# Altium PCB wius.PcbDoc (part 1 of 2)
Units mm, origin at the board's own origin, x right, y up, seen from the top; angles counter-clockwise.
Board outline 54.2 x 28 mm, 6 copper layers (Top Layer, Int1 (GND), Int2 (Sign), Int3 (Sign), Int4 (GND), Bottom Layer), stack 0.776 mm thick; 119 components, 109 nets, 466 pads, 337 vias.
Unrouted connection lines stored in the file: 8.
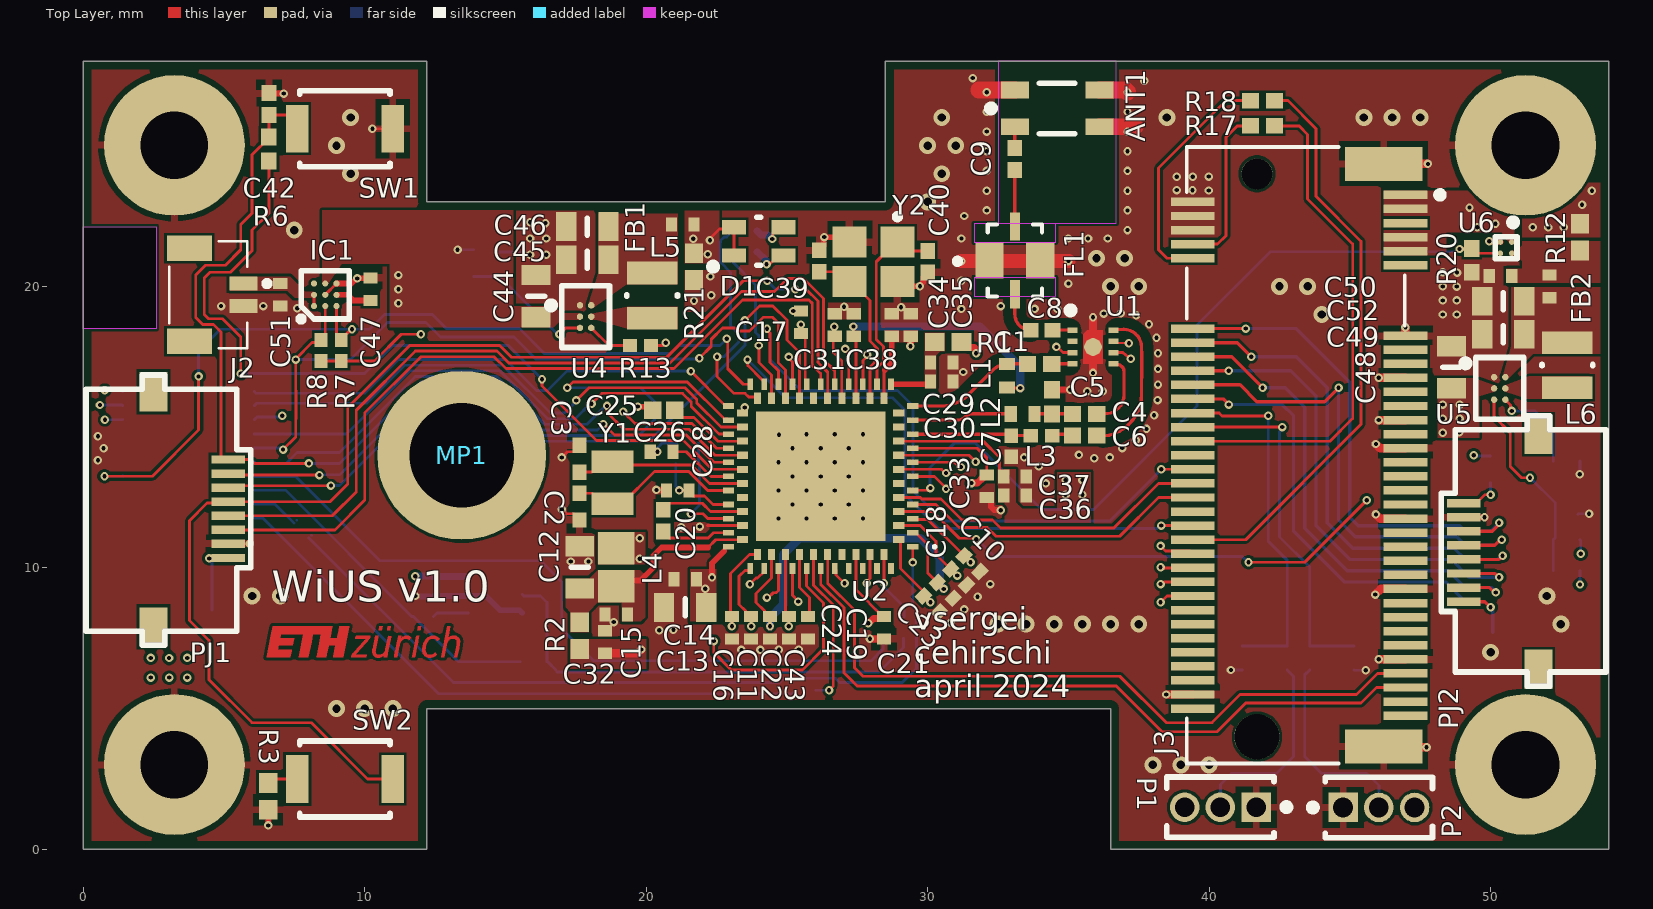
[diagram p0: Top Layer view]
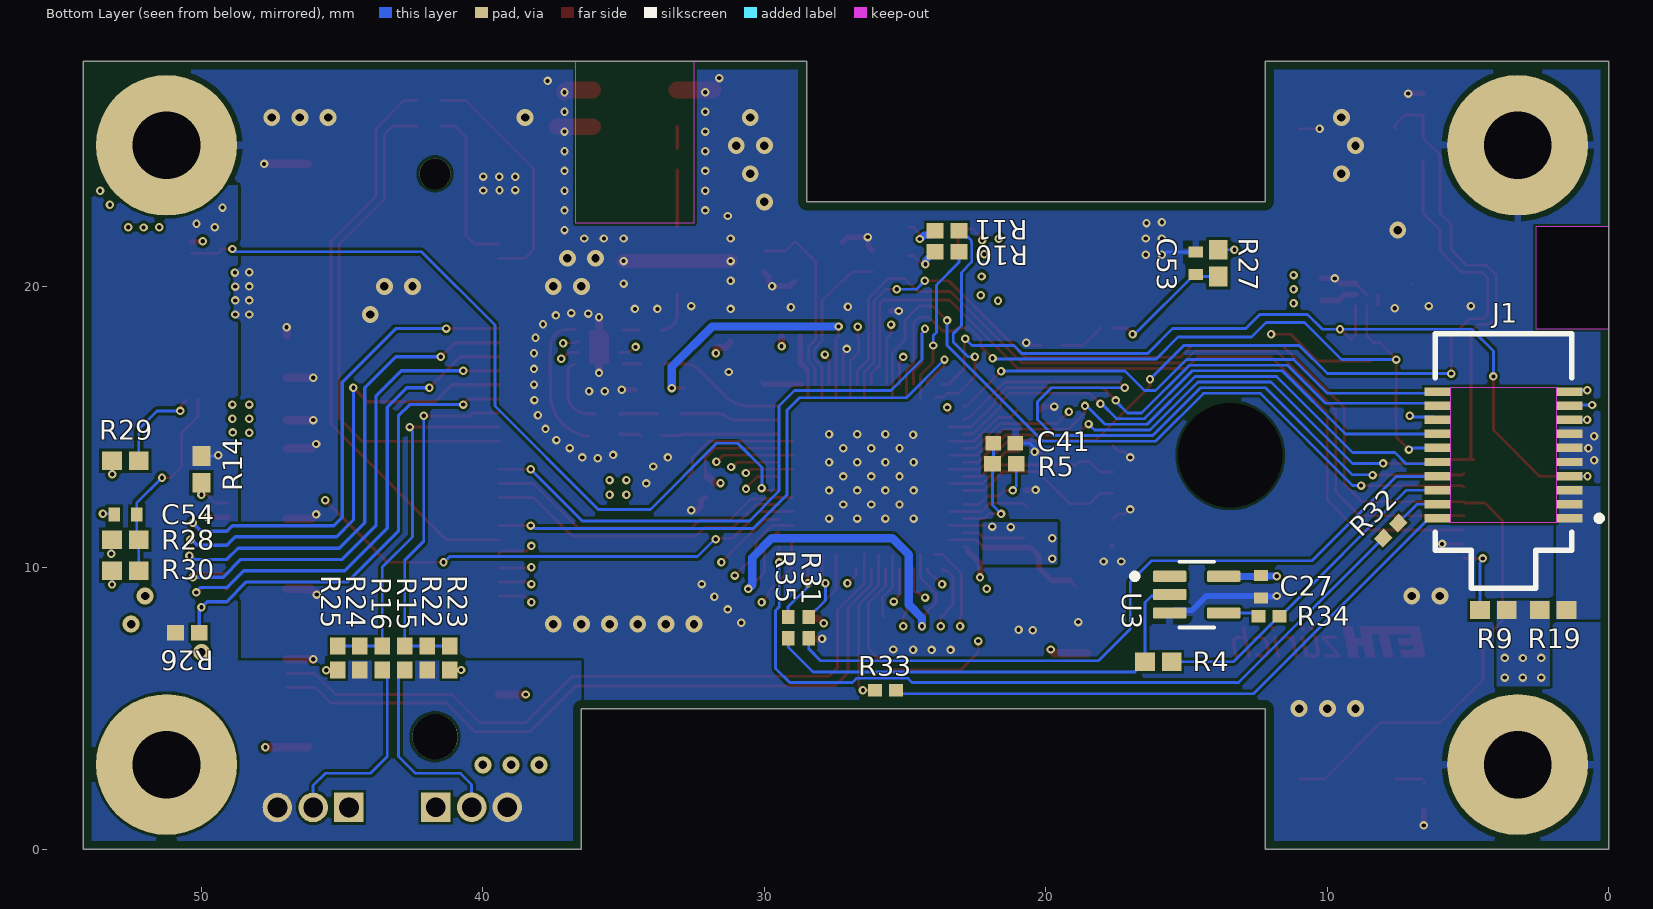
[diagram p1: Bottom Layer view, seen from below]
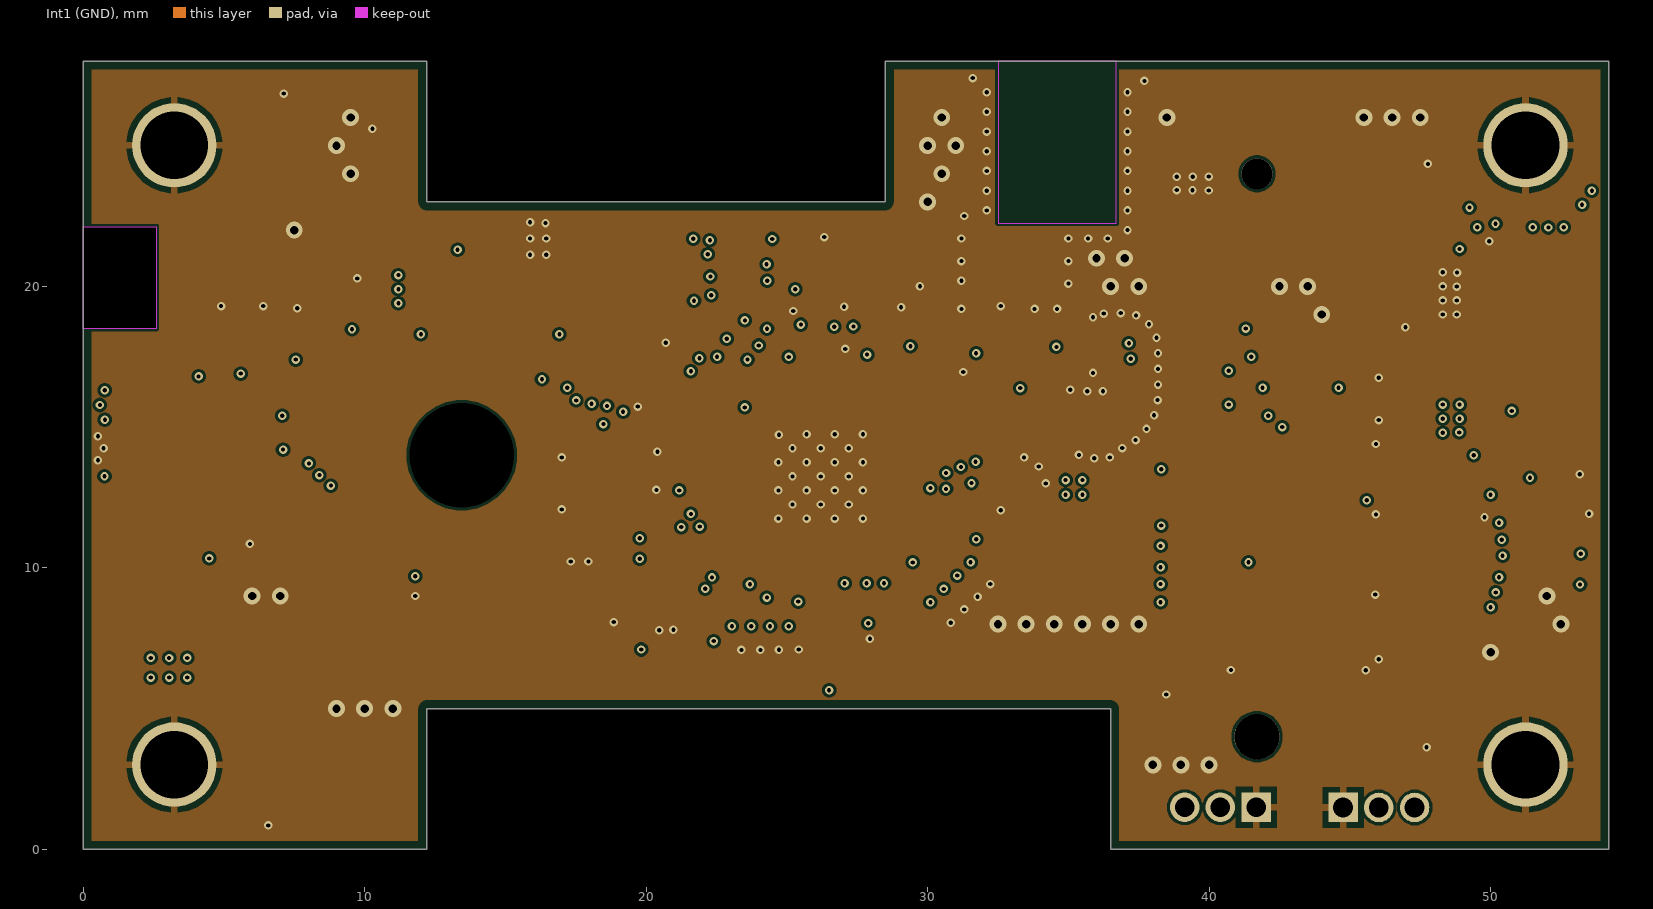
[diagram p2: Int1 (GND)]
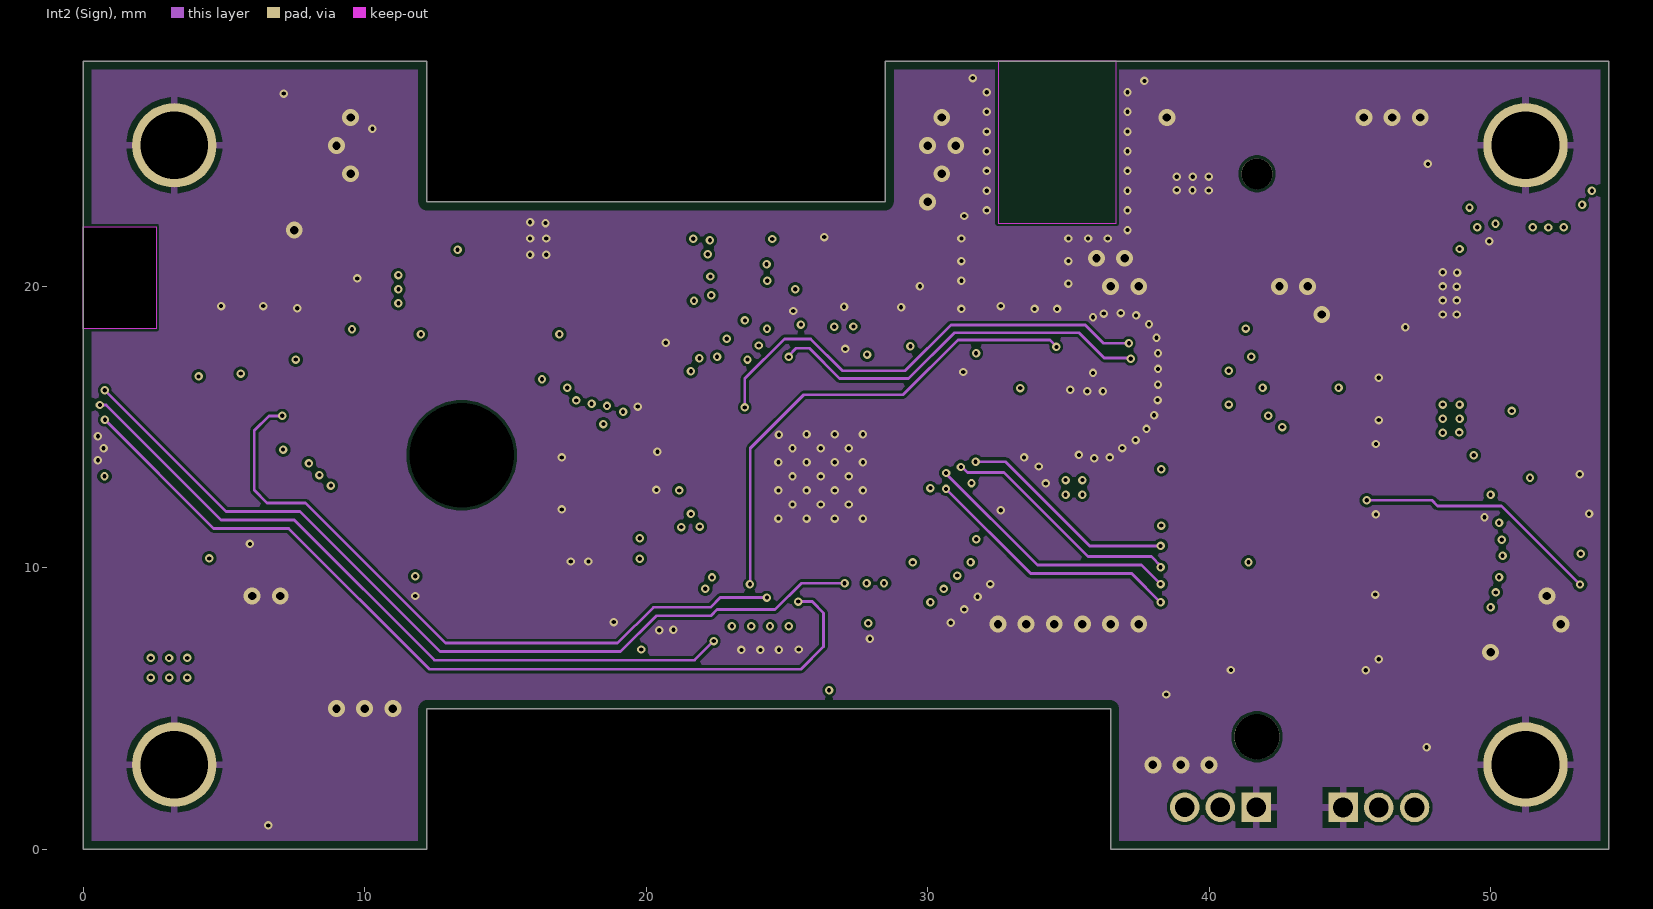
[diagram p3: Int2 (Sign)]
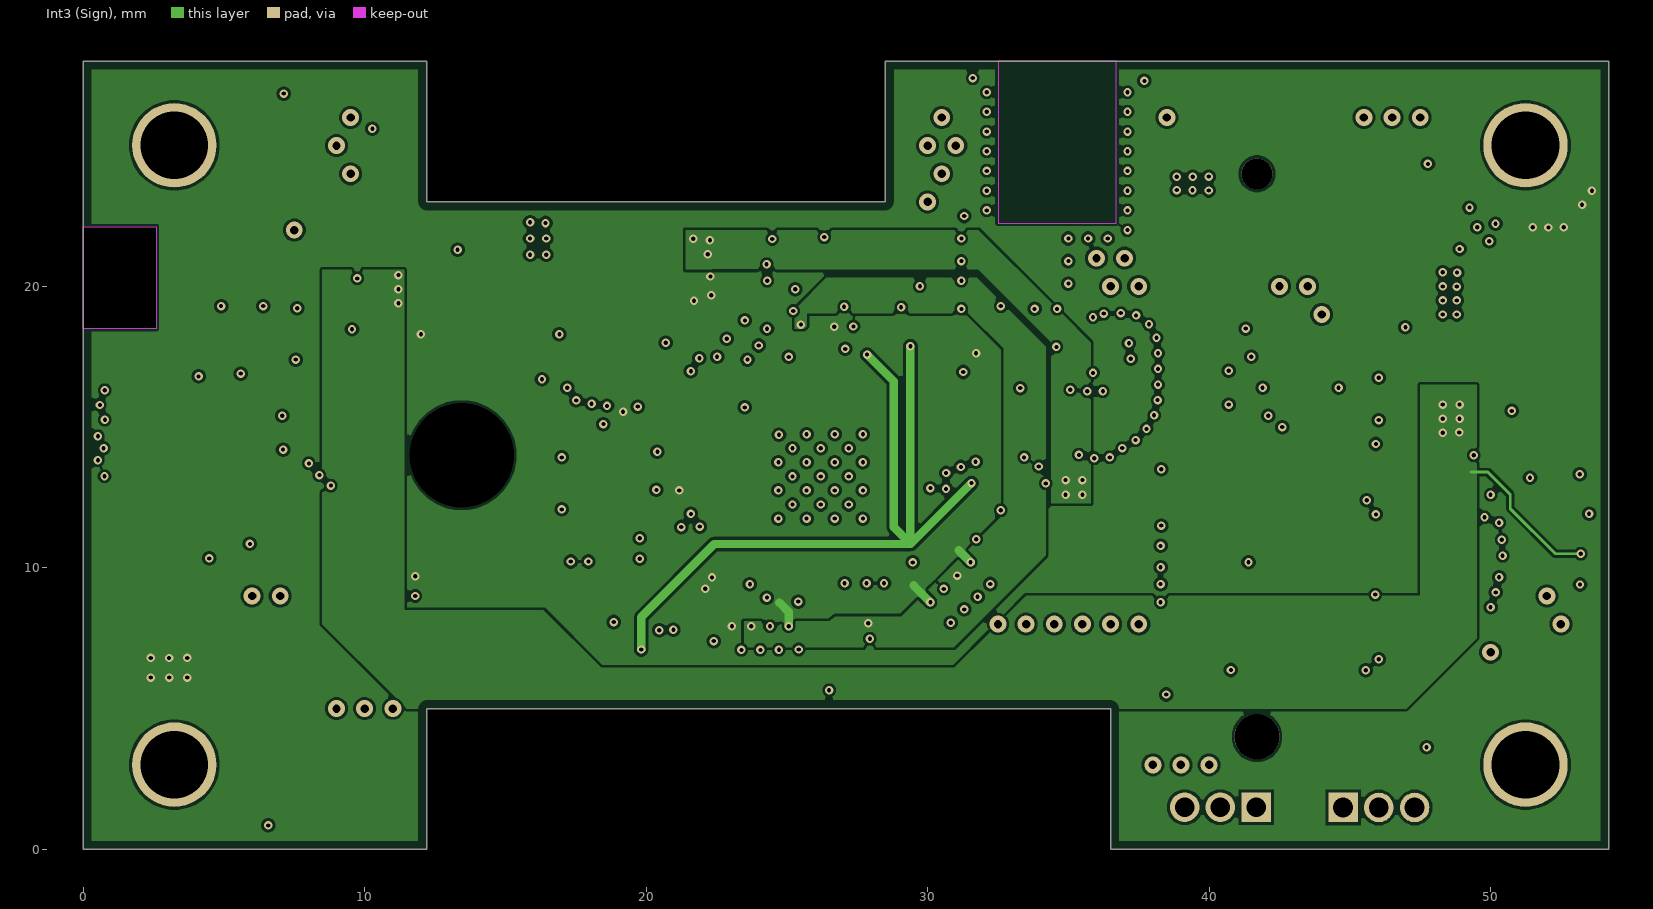
[diagram p4: Int3 (Sign)]
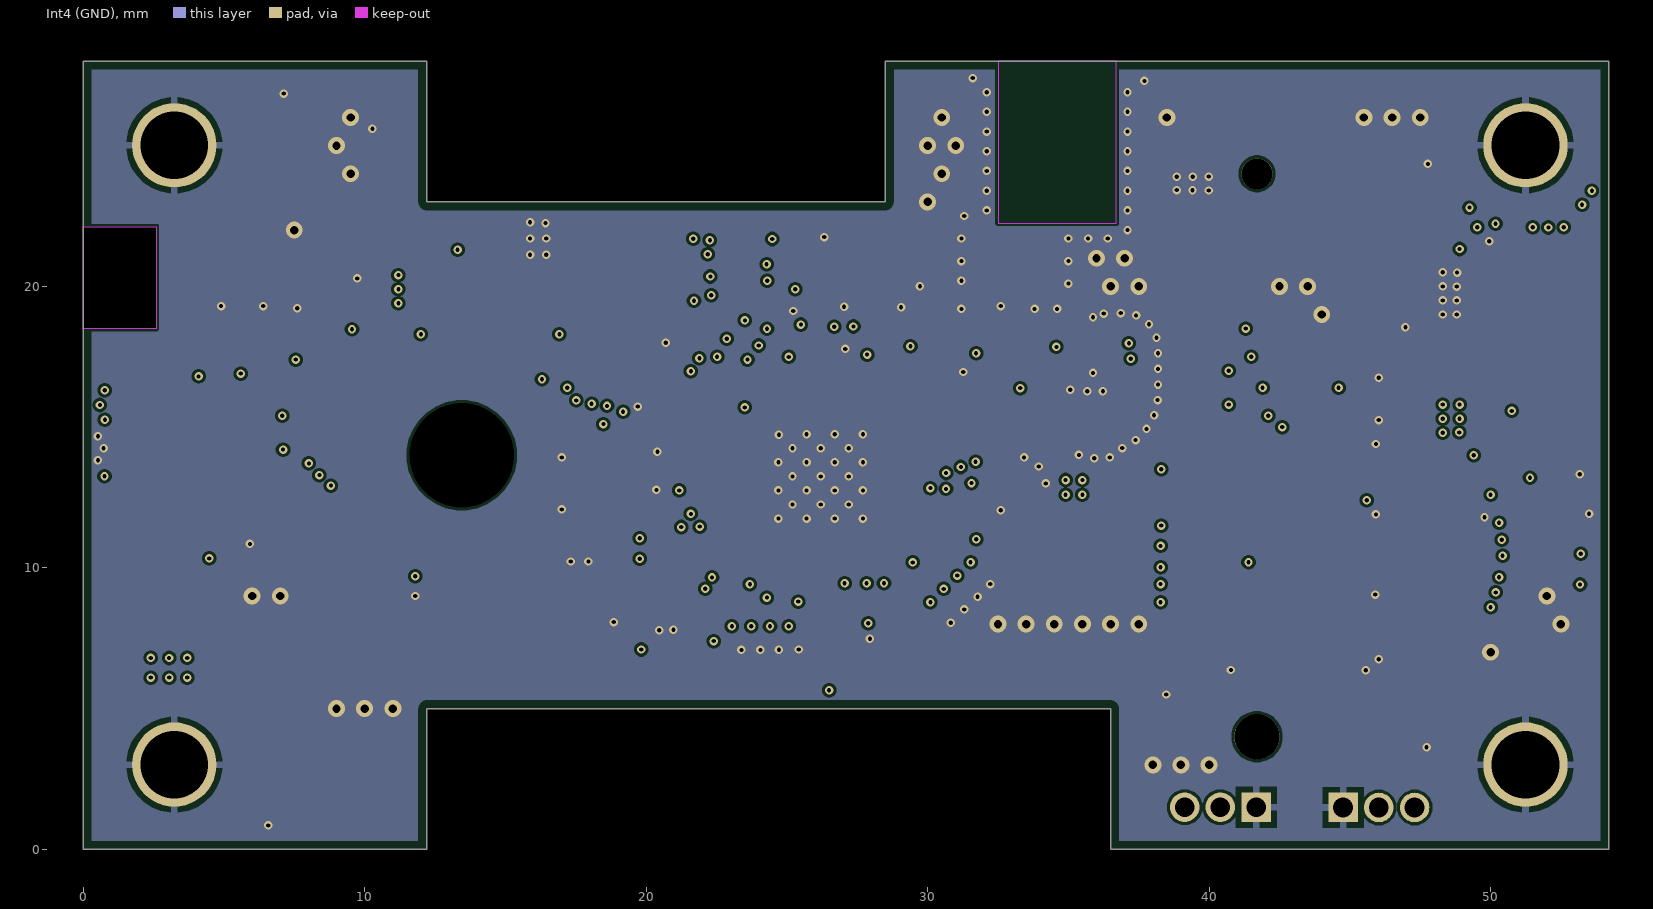
[diagram p5: Int4 (GND)]
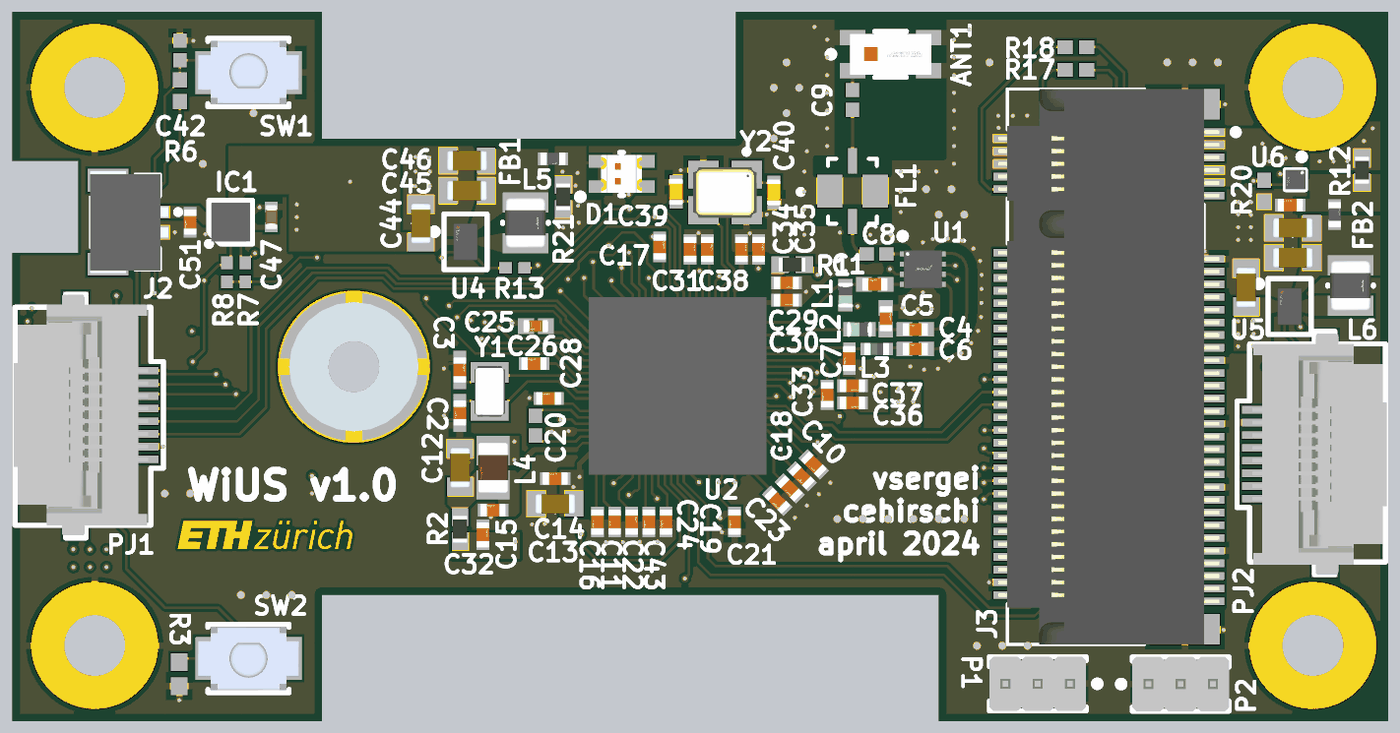
[diagram p7: 3D render of the assembled board from above, using the file's embedded part models]

## Layer stack, top to bottom
Top Solder: solder mask 0.0254, SM-001, Dk 4
Top Layer: signal copper 0.035
Dielectric 1: prepreg 0.0764, PP-007, Dk 3.91
Int1 (GND): signal copper 0.0152
Dielectric 3: core 0.13, Core-015, Dk 4.6
Int2 (Sign): signal copper 0.0152
Dielectric 4: prepreg 0.1164, PP-016, Dk 4.16
Dielectric 5: prepreg 0.1164, PP-016, Dk 4.16
Int3 (Sign): signal copper 0.0152
Dielectric 6: core 0.13, Core-015, Dk 4.6
Int4 (GND): signal copper 0.0152
Dielectric 8: prepreg 0.0764, PP-007, Dk 3.91
Bottom Layer: signal copper 0.035
Bottom Solder: solder mask 0.0254, SM-001, Dk 4

## Board outline
0,0 0,28 12.2,28 12.2,23 28.5,23 28.5,28 54.2,28 54.2,0 36.5,0 36.5,5 12.2,5 12.2,0
cut-out: 2.6,22.125 2.6,18.5 0,18.5 0,22.125

## Design rules (kind name [scope] priority, off if disabled: settings)
BoardOutlineClearance [All] p1: gap=0 ignorepadtopadclearanceinfootprint=FALSE except(0.3: Arc-OutlineEdge Track-OutlineEdge SMDPad-OutlineEdge THPad-OutlineEdge Via-OutlineEdge Fill-OutlineEdge Poly-OutlineEdge Region-OutlineEdge Text-OutlineEdge)
Clearance Clearance_RF [InNetClass('RF')] p1: gap=0.1 ignorepadtopadclearanceinfootprint=TRUE except(0.127: SMDPad-SMDPad; 0.18: Arc-Via Track-Via; 0.2: Arc-THPad Track-THPad; 0.254: Arc-Hole Track-Hole Via-Via; 0.36: Arc-Fill Arc-Poly Arc-Region Track-Fill Track-Poly Track-Region; 0.5: THPad-THPad)
Clearance [All] p2: gap=0.1 ignorepadtopadclearanceinfootprint=TRUE except(0.127: SMDPad-SMDPad; 0.18: Arc-Via Track-Via; 0.2: Arc-THPad Track-THPad; 0.254: Arc-Hole Track-Hole Via-Via; 0.5: THPad-THPad)
ComponentClearance [All] p1: gap=0.17 collisioncheckmode=3 verticalgap=0.254 showdistances=FALSE
DiffPairsRouting [All] p1: maxlimit=0.27 minlimit=0.21 mostfreqgap=0.254 toplayer_maxgap=0.21 toplayer_prefgap=0.21 toplayer_minwidth=0.18 toplayer_maxwidth=0.18 toplayer_prefwidth=0.18 midlayer1_minwidth=0.381 midlayer1_maxwidth=0.381 midlayer1_prefwidth=0.381 midlayer2_mingap=0.25 midlayer2_prefgap=0.27 midlayer2_minwidth=0.11 midlayer2_maxwidth=0.11 midlayer2_prefwidth=0.11 midlayer3_minwidth=0.381 midlayer3_maxwidth=0.381 midlayer3_prefwidth=0.381 midlayer4_minwidth=0.381 midlayer4_maxwidth=0.381 midlayer4_prefwidth=0.381 bottomlayer_maxgap=0.21 bottomlayer_prefgap=0.21 bottomlayer_minwidth=0.18 bottomlayer_maxwidth=0.18 bottomlayer_prefwidth=0.18 maxuncoupledlength=50
FanoutControl Fanout_BGA [IsBGA] p1: bgadir=Out bgaviamode=Centered fanoutstyle=UnderPads fanoutdirection=Alternating viagrid=0.025 // Fanout_BGA (Default Rule)
Height [All] p1: minheight=0 maxheight=10 prefheight=1.524
HoleSize [All] p1: absolutevalues=TRUE maxlimit=6.3 minlimit=0.15 maxpercent=80.000 minpercent=20.000
HoleToHoleClearance HoleToHoleClearance_1 [IsVia vs IsVia] p1: gap=0.254 allowstackedmicrovias=TRUE
HoleToHoleClearance [All] p2: gap=0.5 allowstackedmicrovias=TRUE
MatchedLengths [All] p1: tolerance=0.1 checknetsindiffpair=TRUE checkdiffpairvsdiffpair=FALSE checkxsignals=FALSE checkothers=FALSE
MatchedLengths MatchedLengths_sdio [InNetClass('SDIO')] p2: tolerance=0.2 checknetsindiffpair=FALSE checkdiffpairvsdiffpair=TRUE checkxsignals=TRUE checkothers=TRUE
MatchedLengths MatchedLengths_spi_flash [InNetClass('SPI_FLASH')] p3: tolerance=0.2 checknetsindiffpair=FALSE checkdiffpairvsdiffpair=TRUE checkxsignals=TRUE checkothers=TRUE
MinimumAnnularRing MinimumAnnularRing_hole [Not IsVia] p1: minimumring=0.15
MinimumAnnularRing MinimumAnnularRing_via [IsVia] p2: minimumring=0.05
MinimumSolderMaskSliver [All] p1: minsoldermaskwidth=0.05
PlaneClearance [All] p1: clearance=0.25
PlaneConnect [All] p1: pad.planeconnectstyle=Relief pad.reliefexpansion=0.16 pad.reliefentries=4 pad.reliefconductorwidth=0.16 pad.reliefairgap=0.16 via.planeconnectstyle=Direct via.reliefexpansion=0.16 via.reliefentries=4 via.reliefconductorwidth=0.16 via.reliefairgap=0.16
PolygonConnect PolygonConnect_1 [InNet('GND') vs (InPadClass('All Pads'))] p1: connectstyle=Relief reliefconductorwidth=0.254 reliefentries=4 polygonreliefangle="90 Angle" airgapwidth=0.2
PolygonConnect [Not InNet('GND') or Not InNet('AGND')] p2: connectstyle=Direct reliefconductorwidth=0.254 reliefentries=4 polygonreliefangle="90 Angle" airgapwidth=0.2
RoutingVias [All] p1: holewidth=0.2 width=0.4 viastyle="Through Hole" minholewidth=0.15 minwidth=0.3 maxholewidth=0.4 maxwidth=1.27
SilkToSilkClearance [All] p1: silktosilkclearance=0.01
SilkToSolderMaskClearance [IsPad] p1: minsilkscreentomaskgap=0.01 clearancetoexposedcopper=TRUE
SolderMaskExpansion SolderMaskExpansion_1 [isvia] p1: expansion=0.102 istentingtop=TRUE
SolderMaskExpansion [All] p2: expansion=0.038 istentingtop=FALSE
UnRoutedNet [All] p1: checkbadconnections=TRUE
ViasUnderSMD [All] p1: allowed=TRUE
Width "Schematic Width Constraint_2" [InNet('NetC8_1')] p1: maxlimit=0.118 minlimit=0.117 preferedwidth=0.118 toplayer_maxwidth=0.117 toplayer_prefwidth=0.117 midlayer1_minwidth=0.118 midlayer2_minwidth=0.118 bottomlayer_maxwidth=0.117 bottomlayer_prefwidth=0.117 impedanceprofiledriven=TRUE impedanceprofileid={907723B0-F067-4E6D-A726-1A265D9D0D74} impedanceprofilevalue=50.000000 minimp=50.000000 maximp=50.000000 favimp=50.000000
Width "Schematic Width Constraint_1" [InNet('NetC4_2')] p2: maxlimit=0.118 minlimit=0.117 preferedwidth=0.118 toplayer_maxwidth=0.117 toplayer_prefwidth=0.117 midlayer1_minwidth=0.118 midlayer2_minwidth=0.118 bottomlayer_maxwidth=0.117 bottomlayer_prefwidth=0.117 impedanceprofiledriven=TRUE impedanceprofileid={907723B0-F067-4E6D-A726-1A265D9D0D74} impedanceprofilevalue=50.000000 minimp=50.000000 maximp=50.000000 favimp=50.000000
Width "Schematic Width Constraint" [InNet('NetC1_1')] p3: maxlimit=0.118 minlimit=0.117 preferedwidth=0.118 toplayer_maxwidth=0.117 toplayer_prefwidth=0.117 midlayer1_minwidth=0.118 midlayer2_minwidth=0.118 bottomlayer_maxwidth=0.117 bottomlayer_prefwidth=0.117 impedanceprofiledriven=TRUE impedanceprofileid={907723B0-F067-4E6D-A726-1A265D9D0D74} impedanceprofilevalue=50.000000 minimp=50.000000 maximp=50.000000 favimp=50.000000
Width "Schematic Width Constraint_21" [InNet('NetC7_1')] p4: maxlimit=0.118 minlimit=0.117 preferedwidth=0.118 toplayer_maxwidth=0.117 toplayer_prefwidth=0.117 midlayer1_minwidth=0.118 midlayer2_minwidth=0.118 bottomlayer_maxwidth=0.117 bottomlayer_prefwidth=0.117 impedanceprofiledriven=TRUE impedanceprofileid={907723B0-F067-4E6D-A726-1A265D9D0D74} impedanceprofilevalue=50.000000 minimp=50.000000 maximp=50.000000 favimp=50.000000
Width "Schematic Width Constraint_20" [InNet('NetC6_2')] p5: maxlimit=0.118 minlimit=0.117 preferedwidth=0.118 toplayer_maxwidth=0.117 toplayer_prefwidth=0.117 midlayer1_minwidth=0.118 midlayer2_minwidth=0.118 bottomlayer_maxwidth=0.117 bottomlayer_prefwidth=0.117 impedanceprofiledriven=TRUE impedanceprofileid={907723B0-F067-4E6D-A726-1A265D9D0D74} impedanceprofilevalue=50.000000 minimp=50.000000 maximp=50.000000 favimp=50.000000
Width "Schematic Width Constraint_18" [InNet('NetC8_2')] p6: maxlimit=0.118 minlimit=0.117 preferedwidth=0.118 toplayer_maxwidth=0.117 toplayer_prefwidth=0.117 midlayer1_minwidth=0.118 midlayer2_minwidth=0.118 bottomlayer_maxwidth=0.117 bottomlayer_prefwidth=0.117 impedanceprofiledriven=TRUE impedanceprofileid={907723B0-F067-4E6D-A726-1A265D9D0D74} impedanceprofilevalue=50.000000 minimp=50.000000 maximp=50.000000 favimp=50.000000
Width "Schematic Width Constraint_17" [InNet('NetC9_1')] p7: maxlimit=0.118 minlimit=0.117 preferedwidth=0.118 toplayer_maxwidth=0.117 toplayer_prefwidth=0.117 midlayer1_minwidth=0.118 midlayer2_minwidth=0.118 bottomlayer_maxwidth=0.117 bottomlayer_prefwidth=0.117 impedanceprofiledriven=TRUE impedanceprofileid={907723B0-F067-4E6D-A726-1A265D9D0D74} impedanceprofilevalue=50.000000 minimp=50.000000 maximp=50.000000 favimp=50.000000
Width "Schematic Width Constraint_16" [InNet('NetANT1_1')] p8: maxlimit=0.118 minlimit=0.117 preferedwidth=0.118 toplayer_maxwidth=0.117 toplayer_prefwidth=0.117 midlayer1_minwidth=0.118 midlayer2_minwidth=0.118 bottomlayer_maxwidth=0.117 bottomlayer_prefwidth=0.117 impedanceprofiledriven=TRUE impedanceprofileid={907723B0-F067-4E6D-A726-1A265D9D0D74} impedanceprofilevalue=50.000000 minimp=50.000000 maximp=50.000000 favimp=50.000000
Width "Schematic Width Constraint_15" [InNet('NetC4_1')] p9: maxlimit=0.118 minlimit=0.117 preferedwidth=0.118 toplayer_maxwidth=0.117 toplayer_prefwidth=0.117 midlayer1_minwidth=0.118 midlayer2_minwidth=0.118 bottomlayer_maxwidth=0.117 bottomlayer_prefwidth=0.117 impedanceprofiledriven=TRUE impedanceprofileid={907723B0-F067-4E6D-A726-1A265D9D0D74} impedanceprofilevalue=50.000000 minimp=50.000000 maximp=50.000000 favimp=50.000000
Width "Schematic Width Constraint_14" [InNet('NetL2_2')] p10: maxlimit=0.118 minlimit=0.117 preferedwidth=0.118 toplayer_maxwidth=0.117 toplayer_prefwidth=0.117 midlayer1_minwidth=0.118 midlayer2_minwidth=0.118 bottomlayer_maxwidth=0.117 bottomlayer_prefwidth=0.117 impedanceprofiledriven=TRUE impedanceprofileid={907723B0-F067-4E6D-A726-1A265D9D0D74} impedanceprofilevalue=50.000000 minimp=50.000000 maximp=50.000000 favimp=50.000000
Width "Schematic Width Constraint_13" [InNet('NetC1_2')] p11: maxlimit=0.118 minlimit=0.117 preferedwidth=0.118 toplayer_maxwidth=0.117 toplayer_prefwidth=0.117 midlayer1_minwidth=0.118 midlayer2_minwidth=0.118 bottomlayer_maxwidth=0.117 bottomlayer_prefwidth=0.117 impedanceprofiledriven=TRUE impedanceprofileid={907723B0-F067-4E6D-A726-1A265D9D0D74} impedanceprofilevalue=50.000000 minimp=50.000000 maximp=50.000000 favimp=50.000000
Width "Schematic Width Constraint_11" [InNet('NetC6_1')] p12: maxlimit=0.118 minlimit=0.117 preferedwidth=0.118 toplayer_maxwidth=0.117 toplayer_prefwidth=0.117 midlayer1_minwidth=0.118 midlayer2_minwidth=0.118 bottomlayer_maxwidth=0.117 bottomlayer_prefwidth=0.117 impedanceprofiledriven=TRUE impedanceprofileid={907723B0-F067-4E6D-A726-1A265D9D0D74} impedanceprofilevalue=50.000000 minimp=50.000000 maximp=50.000000 favimp=50.000000
Width Width_power_lines [InNetClass('Power')] p13: maxlimit=1 minlimit=0.051 preferedwidth=0.35 midlayer3_minwidth=0.16 midlayer3_prefwidth=0.5 midlayer4_minwidth=0.16 midlayer4_prefwidth=0.5 minimp=50.000000 maximp=50.000000 favimp=50.000000
Width [All] p14: maxlimit=1 minlimit=0.09 preferedwidth=0.236 toplayer_prefwidth=0.2 midlayer1_prefwidth=0.1 midlayer2_prefwidth=0.1 midlayer3_minwidth=0.1 midlayer4_minwidth=0.1 bottomlayer_prefwidth=0.2 minimp=50.000000 maximp=50.000000 favimp=50.000000
18 further rules are at their usual default settings.

## Classes and differential pairs
net class RF: NetC1_1 NetC1_2 NetC4_1 NetC4_2 NetC6_1 NetC6_2 NetC7_1 NetC8_1 NetC8_2 NetC9_1 NetL2_2
net class SWD_MCU: SWD_SWCLK SWD_SWDIO SWD_SWO
net class Power: 1V8 3V3 AUX_AVDD NetPJ1_1 NetPJ2_1 RF_AVDD RF_VBATT UULP_VOUTSCDC UULP_VOUTSCDC_RETN VBAT VBUS VOUTBCKDC VOUTLDO1P8 VOUTLDOAFE VOUTLDOSOC VSYS
net class JTAG_GAP: JTAG_CLK JTAG_NTRST JTAG_TDI JTAG_TDO JTAG_TMS NRESET
component class "RF power conversion": C29 C30 C32 C33 C34 C35 C36 C37 C38 C39 C40 R1 R2 Y2
component class "I/O bank B": C28 C31 C43 R7 R8
component class "I/O bank A": C10 C21 C27 R4 R31 R32 R33 R34 R35 U2 U3
net class SPI_GAP: SPI_GAP_CS SPI_GAP_MISO SPI_GAP_MOSI SPI_GAP_SCLK
net class SPI_FPGA: NetJ1_02 NetJ1_04 NetJ1_08 NetR4_1 SPI_FPGA_SCLK_BUF
component class "Core power conversion": C11 C12 C13 C14 C15 C16 C17 C18 C19 C20 C22 C23 C24 C25 C26 L4
component class "RF FRONTEND & CLOCKS": C1 C2 C3 C4 C5 C6 C7 C8 C9 FL1 L1 L2 L3 U1 Y1
component class "Power conversion": C44 C45 C46 C47 C48 C49 C50 C51 C52 C53 C54 FB1 FB2 IC1 L5 L6 R12 R13 R19 R20 R21 R27 R28 R29 R30 U4 U5 U6
component class "GAPmod interface": J3 MP1 P1 P2 PJ2 R14 R15 R16 R17 R18 R22 R23 R24 R25 R26
component class "DEBUG, RESET & POC_IN, PROGRAMMING INTERFACE": C41 C42 D1 PJ1 R3 R5 R6 R9 R10 R11 SW1 SW2
component class Connectors: J1 J2

## Components (designator, comment, footprint, x,y, rotation, side; value= is the part's Value field where it differs from the comment)
ANT1 "2450AT18D0100001E" FP-2450AT18D0100001E-MFG 34.6,26.321 r0 top
C1 "8.2p" FP-GJM155-0_05-IPC_B 33.979,17.246 r180 top
C2 "12p" FP-GRM155-0_05-MFG#1 17.625,12.175 r270 top
C3 "12p" FP-GRM155-0_05-MFG#1 17.625,13.875 r90 top
C4 "8.2p" FP-GJM155-0_05-IPC_B 35.575,15.471 r180 top
C5 "1.3p" FP-GJM155-0_05-IPC_B 34.416,15.894 r90 top
C6 "8.2p" FP-GJM155-0_05-IPC_B 35.575,14.696 r180 top
C7 "0.7p" FP-GJM155-0_05-IPC_C 32.975,14.321 r270 top
C8 "18p" CAPC1005X55X25LL05T10 34.05,18.446 r180 top
C9 "18p" CAPC1005X55X25LL05T10 33.1,24.521 r90 top
C10 "100n" FP-GRT155-0_05-MFG 31.575,10.15 r315 top
C11 "1u" FP-GRM155-0_05-MFG#2 23.725,7.875 r270 top
C12 "10u" CAPC1608X100N 17.637,10.019 r270 top
C13 "10u" CAPC1608X100N 21.387,8.594 r0 top
C14 "100n" FP-GRT155-0_05-MFG 21.387,9.594 r180 top
C15 "100n" FP-GRT155-0_05-MFG 18.937,8.344 r180 top
C16 "1u" FP-GRM155-0_05-MFG#2 23.05,7.875 r270 top
C17 "100n" FP-GRT155-0_05-MFG 25.5,18.725 r90 top
C18 "100n" FP-GRT155-0_05-MFG 31.1,9.675 r315 top
C19 "100n" FP-GRT155-0_05-MFG 28.45,7.875 r270 top
C20 "10n" CAPC1005X55X25LL05T10 20.606,11.678 r270 top
C21 "100n" FP-GRT155-0_05-MFG 30.133,8.717 r315 top
C22 "1u" FP-GRM155-0_05-MFG#2 24.4,7.875 r90 top
C23 "100n" FP-GRT155-0_05-MFG 30.625,9.2 r315 top
C24 "1u" FP-GRM155-0_05-MFG#2 25.75,7.875 r270 top
C25 "2.2u" FP-GRM155-0_2-IPC_C 20.625,15.6 r180 top
C26 "1u" FP-GRM155-0_05-MFG#2 20.55,14.125 r180 top
C27 "100n" FP-GRT155-0_05-MFG 12.35,9.325 r270 bottom
C28 "100n" FP-GRT155-0_05-MFG 21.125,12.75 r180 top
C29 "1u" FP-GRM155-0_05-MFG#2 30.5,17.3 r0 top
C30 "100n" FP-GRT155-0_05-MFG 30.5,16.625 r0 top
C31 "1u" FP-GRM155-0_05-MFG#2 26.7,18.625 r90 top
C32 "1u" FP-GRM155-0_05-MFG#2 18.537,7.369 r90 top
C33 "100n" FP-GRT155-0_05-MFG 32.101,12.895 r270 top
C34 "100n" FP-GRT155-0_05-MFG 28.725,18.625 r90 top
C35 "100n" FP-GRT155-0_05-MFG 29.4,18.625 r90 top
C36 "1u" FP-GRM155-0_05-MFG#2 33.1,12.575 r0 top
C37 "100n" FP-GRT155-0_05-MFG 33.1,13.25 r0 top
C38 "1u" FP-GRM155-0_05-MFG#2 27.375,18.625 r90 top
C39 "Capacitor 10 pF +/- 0.25 pF 50 V 0402" CAPC1005X55X30LL05T10 26.15,20.9 r90 top value=10pF
C40 "Capacitor 10 pF +/- 0.25 pF 50 V 0402" CAPC1005X55X30LL05T10 30,20.875 r270 top value=10pF
C41 "10n" CAPC1005X55X25LL05T10 21.475,14.425 r180 bottom
C42 "10n" CAPC1005X55X25LL05T10 6.6,26.475 r90 top
C43 "100n" FP-GRT155-0_05-MFG 25.075,7.875 r270 top
C44 "10u" CAPC1608X100N 16.089,19.65 r270 top
C45 "10u" CAPC1608X100N 17.91,20.943 r0 top
C46 "10u" CAPC1608X100N 17.911,22.125 r0 top
C47 "470n" FP-GRM15-0_1-MFG 10.2,19.9 r90 top value=0.47uF
C48 "10u" CAPC1608X100N 48.608,17.126 r270 top
C49 "10u" CAPC1608X100N 50.45,18.3 r0 top
C50 "100n" FP-GRT155-0_05-MFG 50.35,20.375 r180 top
C51 "100n" FP-GRT155-0_05-MFG 7,19.7 r270 top
C52 "10u" CAPC1608X100N 50.45,19.475 r0 top
C53 "100n" FP-GRT155-0_05-MFG 14.675,20.825 r90 bottom
C54 "100n" FP-GRT155-0_05-MFG 52.7,11.9 r0 bottom
D1 "RED" FP-APTB1615SURKCGKC-F01-MFG 24,21.6 r180 top
FB1 "70m" FP-BLM15-0_05-MFG 21.3,22.2 r0 top
FB2 "70m" FP-BLM15-0_05-MFG 52.1,20 r90 top
FL1 "2450BP15E0100E" FIL_2450BP15E0100E 33.1,20.921 r90 top
IC1 "MAX17262HEWL+" BGA9C40P3X3_153X153X69 8.6,19.7 r90 top
J1 "SS5-10-3.00-X-D-K-XX" SAMTEC_SS5-10-3.00-X-D-K-XX 3.74,14.01 r270 bottom locked
J2 "DF52-2S-0.8H(21)" DF522S08H21 4.8,19.7 r270 top
J3 "2199230-5" TE_2199230-5 41.7,14 r270 top locked
L1 "6.2n" FP-LQG15WH_02-IPC_C 32.825,16.824 r270 top
L2 "3.4n" FP-LQG15WH_02-IPC_C 33.375,15.471 r180 top
L3 "3.3n" FP-LQG15HH_02-IPC_C 34.05,14.696 r180 top
L4 "1u" FP-DFE201210U-IPC_C 18.937,10.019 r270 top
L5 "2.2u" FP-DFE201612C-MFG 20.214,19.675 r90 top
L6 "2.2u" FP-DFE201612C-MFG 52.725,17.2 r90 top
MP1 "9774025151R" 9774025151 13.45,14 r0 top
P1 "BOOT0" SLIN-GRPB031VWVN-RC_V 40.4,1.5 r180 top
P2 "BOOT1" SLIN-GRPB031VWVN-RC_V 46.03,1.487 r0 top
PJ1 "MOLEX_5051100892" MOLEX_5051100892 3.7,12.1 r90 top
PJ2 "MOLEX_5051100892" MOLEX_5051100892 50.5,10.55 r270 top
R1 "Resistor 0R 0402 63 mW" RESC1005X40X25ML05T10 30.725,18.025 r180 top value=0
R2 "Resistor 0R 0402 63 mW" RESC1005X40X25ML05T10 17.637,7.594 r270 top value=0
R3 "100" RESC1005X40X25ML05T10 6.572,1.881 r90 top
R4 "Resistor 0R 0402 63 mW" RESC1005X40X25ML05T10 16.003,6.666 r180 bottom value=0
R5 "100k" RESC1005X40X25NL05T10 21.475,13.7 r180 bottom
R6 "100k" RESC1005X40X25NL05T10 6.6,24.875 r270 top
R7 "1k" RESC1005X40X25LL05T10 9.172,17.725 r270 top
R8 "1k" RESC1005X40X25LL05T10 8.45,17.725 r270 top
R9 "Resistor 0R 0402 63 mW" RESC1005X40X25ML05T10 4.1,8.5 r180 bottom value=0
R10 "280" RESC1005X40X25NL05T10 23.51,21.225 r0 bottom
R11 "280" RESC1005X40X25NL05T10 23.51,21.975 r0 bottom
R12 "Resistor 0R 0402 63 mW" RESC1005X40X25ML05T10 53.175,21.75 r270 top value=0
R13 "267k" RESC1005X40X25LL05T10 19.8,17.9 r180 top
R14 "Resistor 0R 0402 63 mW" RESC1005X40X25ML05T10 50,13.5 r90 bottom value=0
R15 "100k" RESC1005X40X25NL05T10 42.775,6.8 r270 bottom
R16 "100k" RESC1005X40X25NL05T10 43.575,6.8 r270 bottom
R17 "280" RESC1005X40X25NL05T10 41.9,25.7 r0 top
R18 "280" RESC1005X40X25NL05T10 41.9,26.6 r0 top
R19 "Resistor 0R 0402 63 mW" RESC1005X40X25ML05T10 1.975,8.5 r180 bottom value=0
R20 "100k" RESC1005X40X25NL05T10 49.325,20.925 r90 top
R21 "Resistor 0R 0402 63 mW" RESC1005X40X25ML05T10 21.7,20.7 r270 top value=0
R22 "100k" RESC1005X40X25NL05T10 41.975,6.8 r270 bottom
R23 "100k" RESC1005X40X25NL05T10 41.175,6.8 r270 bottom
R24 "100k" RESC1005X40X25NL05T10 44.375,6.8 r270 bottom
R25 "100k" RESC1005X40X25NL05T10 45.15,6.8 r270 bottom
R26 "100k" RESC1005X40X25NL05T10 50.5,7.7 r0 bottom
R27 "Resistor 0R 0402 63 mW" RESC1005X40X25ML05T10 13.875,20.825 r270 bottom value=0
R28 "Resistor 0R 0402 63 mW" RESC1005X40X25ML05T10 52.7,11 r180 bottom value=0
R29 "Resistor 0R 0402 63 mW" RESC1005X40X25ML05T10 52.7,13.8 r0 bottom value=0
R30 "Resistor 0R 0402 63 mW" RESC1005X40X25ML05T10 52.7,9.9 r180 bottom value=0
R31 "22" RESC1005X40X25LL05T10 28.425,7.875 r270 bottom
R32 "22" RESC1005X40X25LL05T10 7.75,11.325 r135 bottom
R33 "22" RESC1005X40X25LL05T10 25.7,5.65 r180 bottom
R34 "22" RESC1005X40X25LL05T10 12.075,8.275 r180 bottom
R35 "22" RESC1005X40X25LL05T10 29.15,7.875 r270 bottom
SW1 "B3U-1000P" FP-B3U-1000P-MFG 9.3,25.6 r180 top
SW2 "B3U-1000P" FP-B3U-1000P-MFG 9.3,2.5 r0 top
U1 "SKY13317-373LF" FP-SKY13317-373LF-MFG 35.875,17.846 r0 top
U2 "IC RF TXRX+MCU WIFI BLE 84QFN" SIWG917M110LGTBA 26.2,13.25 r180 top locked
U3 "NC7SV17P5X" SOT65P210X110-5N 14.64,9.05 r180 bottom
U4 "TPS62840YBGR" FP-YBG0006-MFG 17.85,18.925 r0 top
U5 "TPS62840YBGR" FP-YBG0006-MFG 50.325,16.375 r0 top
U6 "TPS22916CNYFPR" FP-YFP0004-IPC_C 50.55,21.375 r270 top
Y1 "32.768KHZ" XTAL_CM8V-T1A-32.768KHZ-7PF-20PPM-TA-QC 18.8,13.025 r90 top
Y2 "FA-20H_40.0000MF10Z-K3" XTAL_FA-20H_40.0000MF10Z-K3 28.075,20.875 r270 top

## Footprints (in the part's own frame and the unit in brackets; to place one, negate y for a bottom-side part, rotate by r counter-clockwise, add the part's x,y. Pads: shape width x height; smd on the part's side, far side on the other; paste and mask are expansions set on the pad)
9774025151 [mm] "SMT Steel Spacer with internal Thread M2.5, height 2.5mm"
  round 6 / inner round 0 / far side round 0 hole 3.7 unplated: 1(0,0)
  body extent -2.55,-2.55 2.55,2.55, height 2.5
BGA9C40P3X3_153X153X69 [mm]
  round 0.216 smd: A1(-0.4,0.4) A2(0,0.4) A3(0.4,0.4) B1(-0.4,0) B2(0,0) B3(0.4,0) C1(-0.4,-0.4) C2(0,-0.4) C3(0.4,-0.4)
  silkscreen extent -0.96,-0.86 0.86,0.96, body extent -0.76,-0.76 0.76,0.76, height 0.69
CAPC1005X55X25LL05T10 [mm] "Chip Capacitor, 2-Leads, Body 1.00x0.50mm, IPC High Density"
  rect 0.56x0.52 smd: 1(-0.39,0) 2(0.39,0)
  body extent -0.53,-0.28 0.53,0.28, height 0.55
CAPC1005X55X30LL05T10 [mm] "Chip Capacitor, 2-Leads, Body 1.05x0.55mm, IPC High Density"
  rect 0.56x0.52 smd: 1(-0.38,0) 2(0.38,0)
  body extent -0.53,-0.28 0.53,0.28, height 0.55
CAPC1608X100N [mm]
  rect 0.72x1.02 smd: 1(-0.75,0) 2(0.75,0)
  silkscreen extent 0,-0.3 0,0.3, body extent -0.8,-0.4 0.8,0.4, height 1
DF522S08H21 [mm]
  rect 0.5x1 smd: 1(-0.4,0.89) 2(0.4,0.89)
  rect 0.9x1.6 smd: 3(-1.65,-1.03) 4(1.65,-1.03)
  silkscreen extent -1.9,-1.74 1.9,1.83, body extent -2.01,-1.74 2.01,1.34, height 1.1
FIL_2450BP15E0100E [mm]
  rect 1.3x1 smd: 1(0,0.9) 3(0,-0.9)
  rect 1x0.35 smd: 2(1.2,0) 4(-1.2,0)
  silkscreen extent -1.28,-0.96 1.28,2.14
FP-2450AT18D0100001E-MFG [mm]
  rect 1x0.6 smd paste+0 mask+0: 1(-1.5,-0.65) 2(1.5,-0.65) 3(1.5,0.65) 4(-1.5,0.65)
  silkscreen extent -2.47,-0.9 0.63,0.9, body extent -2.1,-1.05 2.1,1.05, height 0.25
FP-APTB1615SURKCGKC-F01-MFG [mm]
  rect 0.85x0.5 smd paste+0 mask+0: 1(0.875,0.5) 2(-0.875,0.5) 3(0.875,-0.5) 4(-0.875,-0.5)
  silkscreen extent -0.07,-0.85 1.75,1.02, body extent -1.4,-0.95 1.4,0.95, height 0.25
FP-B3U-1000P-MFG [mm]
  rect 0.8x1.7 smd paste+0 mask+0: 1(-1.7,0) 2(1.7,0)
  silkscreen extent -1.6,-1.35 1.6,1.35, body extent -2.2,-1.45 2.2,1.45, height 0.25
FP-BLM15-0_05-MFG [mm]
  rect 0.4x0.5 smd paste+0 mask+0: 1(-0.4,0) 2(0.4,0)
  body extent -0.5,-0.25 0.5,0.25, height 0.55
FP-DFE201210U-IPC_C [mm]
  rect 1.154x1.306 smd paste+0 mask+0: 1(-0.676,0) 2(0.676,0)
  body extent -1.35,-0.8 1.35,0.8, height 0.25
FP-DFE201612C-MFG [mm]
  rect 0.8x1.8 smd paste+0 mask+0: 1(-0.8,0) 2(0.8,0)
  silkscreen extent -0.03,-0.9 0.03,0.9, body extent -1,-0.8 1,0.8, height 1.2
FP-GJM155-0_05-IPC_B [mm]
  rect 0.615x0.572 smd paste+0 mask+0: 1(-0.429,0) 2(0.429,0)
  body extent -0.89,-0.44 0.89,0.44, height 0.25
FP-GJM155-0_05-IPC_C [mm]
  rect 0.515x0.472 smd paste+0 mask+0: 1(-0.379,0) 2(0.379,0)
  body extent -0.74,-0.38 0.74,0.38, height 0.25
FP-GRM15-0_1-MFG [mm]
  rect 0.4x0.5 smd paste+0 mask+0: 1(-0.4,0) 2(0.4,0)
  body extent -0.5,-0.25 0.5,0.25, height 0.55
FP-GRM155-0_2-IPC_C [mm]
  rect 0.628x0.606 smd paste+0 mask+0: 1(-0.389,0) 2(0.389,0)
  body extent -0.5,-0.25 0.5,0.25, height 0.7
FP-GRM155-0_05-MFG#1 [mm]
  rect 0.55x0.5 smd paste+0 mask+0: 1(-0.475,0) 2(0.475,0)
  body extent -0.85,-0.38 0.85,0.38, height 0.25
FP-GRM155-0_05-MFG#2 [mm]
  rect 0.4x0.5 smd paste+0 mask+0: 1(-0.4,0) 2(0.4,0)
  body extent -0.5,-0.25 0.5,0.25, height 0.55
FP-GRT155-0_05-MFG [mm]
  rect 0.4x0.5 smd paste+0 mask+0: 1(-0.4,0) 2(0.4,0)
  body extent -0.5,-0.25 0.5,0.25, height 0.55
FP-LQG15HH_02-IPC_C [mm]
  rect 0.515x0.472 smd paste+0 mask+0: 1(-0.379,0) 2(0.379,0)
  body extent -0.74,-0.38 0.74,0.38, height 0.25
FP-LQG15WH_02-IPC_C [mm]
  rect 0.427x0.572 smd paste+0 mask+0: 1(-0.423,0) 2(0.422,0)
  body extent -0.74,-0.43 0.74,0.43, height 0.25
FP-SKY13317-373LF-MFG [mm]
  rect 0.35x0.2 smd paste+0 mask+0: 1(-0.725,0.6) 2(-0.725,0.2) 3(-0.725,-0.2) 4(-0.725,-0.6) 5(0.725,-0.6) 6(0.725,-0.2) 7(0.725,0.2) 8(0.725,0.6)
  round 0.63 smd paste+0 mask+0: 9(0,0)
  Top Layer region: 0.35,0.6 0.1,0.6 0.1,0.65 -0.1,0.65 -0.1,0.6 -0.2,0.6 -0.35,0.45 -0.35,-0.6 -0.1,-0.6 -0.1,-0.65 0.1,-0.65 0.1,-0.6 0.35,-0.6
  silkscreen extent -0.92,1.18 -0.67,1.42, body extent -1,-0.87 1,0.87, height 0.25
FP-YBG0006-MFG [mm]
  round 0.23 smd paste-1000 mask+0.015: A1(-0.2,0.4) A2(0.2,0.4) B1(-0.2,0) B2(0.2,0) C1(-0.2,-0.4) C2(0.2,-0.4)
  silkscreen extent -1.35,-1.1 0.85,1.1, body extent -0.48,-0.73 0.48,0.73, height 0.5
FP-YFP0004-IPC_C [mm]
  round 0.196 smd paste+0 mask+0: A1(-0.2,0.2) A2(0.2,0.2) B1(-0.2,-0.2) B2(0.2,-0.2)
  silkscreen extent -1.02,-0.39 0.39,0.39, body extent -0.49,-0.49 0.49,0.49, height 0.25
MOLEX_5051100892 [mm]
  rect 1.4x1 smd: 0(-4.2,1.2) 0(4.15,1.2)
  rect 0.3x1.2 smd: 1(-1.75,-1.45) 2(-1.25,-1.45) 3(-0.75,-1.45) 4(-0.25,-1.45) 5(0.25,-1.45) 6(0.75,-1.45) 7(1.25,-1.45) 8(1.75,-1.45)
  silkscreen extent -4.85,-2.25 4.75,3.6, body extent -4.75,-1.65 4.75,3.65, height 1.88
RESC1005X40X25LL05T10 [mm] "Chip Resistor, 2-Leads, Body 1.00x0.50mm, IPC High Density"
  rect 0.5x0.45 smd: 1(-0.375,0) 2(0.375,0)
  body extent -0.53,-0.27 0.53,0.28, height 0.4
RESC1005X40X25ML05T10 [mm] "Chip Resistor, 2-Leads, Body 1.05x0.55mm, IPC Low Density"
  rect 0.7x0.65 smd: 1(-0.475,0) 2(0.475,0)
  body extent -0.53,-0.28 0.53,0.28, height 0.4
RESC1005X40X25NL05T10 [mm] "Chip Resistor, 2-Leads, Body 1.00x0.50mm, IPC Medium Density"
  rect 0.6x0.55 smd: 1(-0.425,0) 2(0.425,0)
  body extent -0.53,-0.27 0.53,0.28, height 0.4
SAMTEC_SS5-10-3.00-X-D-K-XX [mm]
  rect 0.3x0.93 smd: 01(2.25,2.335) 02(2.25,-2.335) 03(1.75,2.335) 04(1.75,-2.335) 05(1.25,2.335) 06(1.25,-2.335) 07(0.75,2.335) 08(0.75,-2.335) 09(0.25,2.335) 10(0.25,-2.335) 11(-0.25,2.335) 12(-0.25,-2.335) 13(-0.75,2.335) 14(-0.75,-2.335) 15(-1.25,2.335) 16(-1.25,-2.335) 17(-1.75,2.335) 18(-1.75,-2.335) 19(-2.25,2.335) 20(-2.25,-2.335)
  Top Layer keep-out region: 2.4,-1.87 -2.4,-1.87 -2.4,1.87 2.4,1.87
  Top Layer keep-out region: 2.4,-1.87 -2.4,-1.87 -2.4,1.87 2.4,1.87
  silkscreen extent -4.31,-2.42 4.73,3.5, body extent -4.06,-2.5 4.48,2.5, height 3.37
SIWG917M110LGTBA [mm]
  rect 0.4x0.2 smd mask+0: A1(-3.275,2.5) A2(-3.275,2) A3(-3.275,1.5) A4(-3.275,1) A5(-3.275,0.5) A6(-3.275,0) A7(-3.275,-0.5) A8(-3.275,-1) A9(-3.275,-1.5) A10(-3.275,-2) A11(-3.275,-2.5) A23(3.275,-2.5) A24(3.275,-2) A25(3.275,-1.5) A26(3.275,-1) A27(3.275,-0.5) A28(3.275,0) A29(3.275,0.5) A30(3.275,1) A31(3.275,1.5) A32(3.275,2) A33(3.275,2.5)
  rect 0.2x0.4 smd mask+0: A12(-2.5,-3.275) A13(-2,-3.275) A14(-1.5,-3.275) A15(-1,-3.275) A16(-0.5,-3.275) A17(0,-3.275) A18(0.5,-3.275) A19(1,-3.275) A20(1.5,-3.275) A21(2,-3.275) A22(2.5,-3.275) A34(2.5,3.275) A35(2,3.275) A36(1.5,3.275) A37(1,3.275) A38(0.5,3.275) A39(0,3.275) A40(-0.5,3.275) A41(-1,3.275) A42(-1.5,3.275) A43(-2,3.275) A44(-2.5,3.275)
  rect 0.4x0.25 smd mask+0: B1(-2.775,2.25) B2(-2.775,1.75) B3(-2.775,1.25) B4(-2.775,0.75) B5(-2.775,0.25) B6(-2.775,-0.25) B7(-2.775,-0.75) B8(-2.775,-1.25) B9(-2.775,-1.75) B10(-2.775,-2.25) B21(2.775,-2.25) B22(2.775,-1.75) B23(2.775,-1.25) B24(2.775,-0.75) B25(2.775,-0.25) B26(2.775,0.25) B27(2.775,0.75) B28(2.775,1.25) B29(2.775,1.75) B30(2.775,2.25)
  rect 0.25x0.4 smd mask+0: B11(-2.25,-2.775) B12(-1.75,-2.775) B13(-1.25,-2.775) B14(-0.75,-2.775) B15(-0.25,-2.775) B16(0.25,-2.775) B17(0.75,-2.775) B18(1.25,-2.775) B19(1.75,-2.775) B20(2.25,-2.775) B31(2.25,2.775) B32(1.75,2.775) B33(1.25,2.775) B34(0.75,2.775) B35(0.25,2.775) B36(-0.25,2.775) B37(-0.75,2.775) B38(-1.25,2.775) B39(-1.75,2.775) B40(-2.25,2.775)
  rect 4.6x4.6 smd: EP1(0,0)
  silkscreen extent -4.1,2.45 -4,2.55, body extent -3.5,-3.5 3.5,3.5, height 1.05
SLIN-GRPB031VWVN-RC_V [mm] "Header, 3-Leads, Body 3.81x2.14mm, Pitch 1.27mm"
  rect 1.05x1.05 hole 0.7: 1(-1.27,0)
  round 1.05 hole 0.7: 2(0,0) 3(1.27,0)
  silkscreen extent -2.47,-1.07 1.9,1.07, body extent -1.9,-1.07 1.91,1.07, height 4
SOT65P210X110-5N [mm]
  rrect25% 1.19x0.4 smd: 1(-0.96,0.65) 2(-0.96,0) 3(-0.96,-0.65) 4(0.96,-0.65) 5(0.96,0.65)
  silkscreen extent -2.3,-1.17 0.63,1.17
TE_2199230-5 [mm]
  rect 0.3x1.55 smd: 1(-9.25,5.275) 2(-9,-2.275) 3(-8.75,5.275) 4(-8.5,-2.275) 5(-8.25,5.275) 6(-8,-2.275) 7(-7.75,5.275) 8(-7.5,-2.275) 9(-7.25,5.275) 10(-7,-2.275) 11(-6.75,5.275) 20(-4.5,-2.275) 21(-4.25,5.275) 22(-4,-2.275) 23(-3.75,5.275) 24(-3.5,-2.275) 25(-3.25,5.275) 26(-3,-2.275) 27(-2.75,5.275) 28(-2.5,-2.275) 29(-2.25,5.275) 30(-2,-2.275) 31(-1.75,5.275) 32(-1.5,-2.275) 33(-1.25,5.275) 34(-1,-2.275) 35(-0.75,5.275) 36(-0.5,-2.275) 37(-0.25,5.275) 38(0,-2.275) 39(0.25,5.275) 40(0.5,-2.275) 41(0.75,5.275) 42(1,-2.275) 43(1.25,5.275) 44(1.5,-2.275) 45(1.75,5.275) 46(2,-2.275) 47(2.25,5.275) 48(2.5,-2.275) 49(2.75,5.275) 50(3,-2.275) 51(3.25,5.275) 52(3.5,-2.275) 53(3.75,5.275) 54(4,-2.275) 55(4.25,5.275) 56(4.5,-2.275) 57(4.75,5.275) 58(5,-2.275) 59(5.25,5.275) 60(5.5,-2.275) 61(5.75,5.275) 62(6,-2.275) 63(6.25,5.275) 64(6.5,-2.275) 65(6.75,5.275) 66(7,-2.275) 67(7.25,5.275) 68(7.5,-2.275) 69(7.75,5.275) 70(8,-2.275) 71(8.25,5.275) 72(8.5,-2.275) 73(8.75,5.275) 74(9,-2.275) 75(9.25,5.275)
  rect 1.2x2.75 smd: SH1(-10.35,4.5) SH2(10.35,4.5)
  round 1.1 hole 1.1 unplated: ""(-10,0)
  round 1.6 hole 1.6 unplated: ""(10,0)
  silkscreen extent -10.95,-2.5 10.95,6.62, body extent -10.95,-2.85 10.95,5.85, height 4.1
XTAL_CM8V-T1A-32.768KHZ-7PF-20PPM-TA-QC [mm]
  rect 0.8x1.5 smd: 1(-0.75,0) 2(0.75,0)
  body extent -1,-0.6 1,0.6, height 0.6
XTAL_FA-20H_40.0000MF10Z-K3 [mm]
  rect 1.1x1.2 smd: 1(-0.7,0.85) 2(-0.7,-0.85) 3(0.7,-0.85) 4(0.7,0.85)
  silkscreen extent -1.7,0.75 -1.5,0.95, body extent -1,-1.25 1,1.25, height 0.55

## Part data
ANT1: library part CMP-00849-135603252-1, "2450AT18D0100001E 2.4 Ghz SMD Antenna Resiliant", Case/Package=1206, Max Frequency=2.5GHz, Max Operating Temperature=125°C, Min Operating Temperature=-40°C, Power Rating=3W, Bandwidth=100MHz, Gain=-1dB, Height=1.3mm, Impedance=50Ω, NexarPartId=135603252, Number of Bands=1, Return Loss=10dB
C1 C4 C6: library part CMP-2008-03885-2, "Multi-Layer Ceramic Capacitor 8.2pF C0G  ±0.1pF 0402 Paper T/R", Capacitance=8.2pF, Case Code (Imperial)=0402, Case Code (Metric)=1005, Dielectric=C0G, Max Operating Temperature=125°C, Min Operating Temperature=-55°C, Package Quantity=10000, Voltage Rating=50V, Case/Package=0402, Depth=0.5mm, Height=0.5mm, Lead Free="Lead Free", Length=1mm, Mount="Surface Mount", Packaging="Tape and Reel", Radiation Hardening=No, Termination=SMD/SMT, Thickness=0.022inch, Voltage Rating (DC)=50V, Width=0.02inch
C2 C3: library part CMP-2008-03945-2, "CAP CER 12PF 50V C0G/NP0 0402", Capacitance=12pF, Case Code (Imperial)=0402, Case Code (Metric)=1005, Dielectric=C0G, Max Operating Temperature=125°C, Min Operating Temperature=-55°C, Package Quantity=10000, Tolerance=2%, Voltage=50V, Case/Package=0402, Construction=Flat, Depth=0.5mm, Height=0.5mm, Lead Free="Lead Free", Length=1mm, Material=Ceramic, Mount="Surface Mount", Packaging="Tape and Reel", Radiation Hardening=No, REACH SVHC="No SVHC", Series=GRM, Termination=SMD/SMT, Thickness=0.022inch, Voltage Rating=50V, Voltage Rating (DC)=50V, Width=0.5mm
C5: library part CMP-2008-03818-2, "Multi-Layer Ceramic Capacitor 1.3pF C0G  ±0.05pF 0402 Paper T/R", Capacitance=1.3pF, Case Code (Imperial)=0402, Case Code (Metric)=1005, Dielectric=C0G, Max Operating Temperature=125°C, Min Operating Temperature=-55°C, Package Quantity=10000, Voltage Rating=50V, Case/Package=0402, Depth=0.5mm, Height=0.5mm, Lead Free="Lead Free", Length=0.039inch, Mount="Surface Mount", Packaging="Tape and Reel", Radiation Hardening=No, Termination=SMD/SMT, Thickness=0.022inch, Voltage Rating (DC)=50V, Width=0.02inch
C7: library part CMP-2008-03909-2, "Multi-Layer Ceramic Capacitor 0.7pF C0G  ±0.05pF 0402 Paper T/R", Capacitance=0.7pF, Case Code (Imperial)=0402, Case Code (Metric)=1005, Dielectric=C0G, Max Operating Temperature=125°C, Min Operating Temperature=-55°C, Package Quantity=10000, Voltage Rating=50V, Case/Package=0402, Depth=0.5mm, Height=0.5mm, Length=1mm, Mount="Surface Mount", Packaging="Tape and Reel", Radiation Hardening=No, Termination=SMD/SMT, Thickness=0.022inch, Voltage Rating (DC)=50V, Width=0.02inch
C8 C9: library part CMP-2008-04271-1, Manufacturer=Murata, Part Number=GRM1555C1H180GA01D
C10 C14 C15 C17 C18 C19 C21 C23 C27 C28 C30 C33 C34 C35 C37 C43 C50 C51 C53 C54: library part CMP-06035-014200-1, "Multi-Layer Ceramic Capacitor 100nF 50V X7R ±10% 0402 Paper T/R"
C11 C16 C22 C24 C26 C29 C31 C32 C36 C38: library part CMP-06035-025126-1, "Chip Multilayer Ceramic Capacitors for General Purpose, 0402, 1.0uF, X6S, 22%, 10%, 16V", Capacitance=1uF, Dielectric=X6S, Tolerance=10%, Voltage Rating (DC)=16V, Length=1mm, Thickness=500um, Width=500um
C12 C13 C44 C45 C46 C48 C49 C52: library part GMC10X7R106K10NT, "Cap Cer 10UF 10V X7R 0603", Manufacturer_Name=Cal-Chip, Supplier Part Number 1=4713-GMC10X7R106K10NTCT-ND, Datasheet Link=https://88ce57.p3cdn1.secureserver.net/wp-content/uploads/2023/01/gmc_series-2.pdf, Height=1mm, Manufacturer_Part_Number=GMC10X7R106K10NT, Supplier 1=Digikey
C20 C41 C42: library part CMP-1034-01880-2, Manufacturer=Murata, Part Number=GRM155R71E103KA01D
C25: library part CMP-06035-000377-1, "Chip Multilayer Ceramic Capacitors for General Purpose, 0402, 2.2uF, X7S, 22%, 10%, 10V", Capacitance=2.2uF, Case Code (Imperial)=0402, Case Code (Metric)=1005, Dielectric=X7S, Max Operating Temperature=125°C, Min Operating Temperature=-55°C, Package Quantity=10000, Resistor Type=Ceramic, Tolerance=10%, Voltage Rating=10V, Case/Package=0402, Height=0.5mm, Lead Free="Lead Free", Length=0.039inch, Mount="Surface Mount", Packaging="Tape and Reel", Termination=SMD/SMT, Thickness=0.022inch, Voltage Rating (DC)=10V, Weight=0.000212oz, Width=0.5mm
C39 C40: library part CMP-001-00011-6, "Chip Capacitor, 10 pF, +/- 0.25 pF, 50 V, 0402 (1005 Metric)", Capacitor Type=Ceramic, Case/Package=0402, Max Operating Temperature=125°C, Min Operating Temperature=-55°C, Tolerance=0.25%, Voltage Rating=50V, Mounting Technology=SM, Pins=2, RoHS Compliant=True
C47: library part CMP-2000-05009-2, "CAP CER 0.47UF 10V X5R 0402", Capacitance=0.47uF, Manufacturer="Murata Electronics North America", Manufacturer Part Number=GRM155R61A474KE15D, Package=GRM15-0.1, Temperature="-55°C to +85°C", Temperature Characteristic=X5R, Temperature Coefficient=15%, Temperature Range High=+85°C, Temperature Range Low=-55°C, Tolerance=10%, Voltage Rating=10V, Automotive=No, Category=Cap, ComponentLink2Description=Datasheet, ComponentLink2URL=https://search.murata.co.jp/Ceramy/image/img/A01X/G101/ENG/GRM155R61A474KE15-01A.pdf, Device Class L1="Passive Components", Device Class L2=Capacitors, Device Class L3="Ceramic Capacitors", Digikey Description="CAP CER 0.47UF 10V X5R 0402", Height=0.55mm, Ipc Land Pattern Name=CAPC10050X50, Lead Free=Yes, Material=Ceramic, Mouser Description="Multilayer Ceramic Capacitors MLCC - SMD/SMT 0402 0.47uF 10volts X5R 10%", Octopart=https://octopart.com/grm155r61a474ke15d-murata-196883, RoHS=TRUE
D1: library part CMP-44529-000005-1, "LED GREEN/RED CLEAR CHIP SMD", Colour="Red, Green", Forward Current=20mA, Forward Voltage=1.95/2.1V, Manufacturer=Kingbright, Manufacturer Part Number=APTB1615SURKCGKC-F01, Max Junction Temp=+115°C, Power Dissipation=75mW, Reverse Voltage=5V, Temperature="-40°C to +85°C", Temperature Range High=+85°C, Temperature Range Low=-40°C, Automotive=No, Category=Diode, ComponentLink2Description=Datasheet, ComponentLink2URL=http://www.kingbrightusa.com/images/catalog/SPEC/APTB1615SURKCGKC-F01.pdf, Device Class L1=Optoelectronics, Device Class L2=LEDs, Device Class L3=unset, Digikey Description="LED GREEN/RED CLEAR CHIP SMD", Height=0.9mm, Lead Free=Yes, Led Orientation="Top View", Luminous Intensity=200/50mcd, Octopart=https://octopart.com/aptb1615surkcgkc-f01-kingbright-5355651, Package=APTB1615SURKCGKC-F01, Peak Emmision Wavelength=645/574nm, RoHS=TRUE, Viewing Angle=150°, Wavelength=630/570nm
FB1 FB2: library part CMP-0686-00284-4, "Chip Ferrite Bead, 0402, 80Ω @ 100MHz, 0.07Ω, 25%, 1.5A", Case Code (Imperial)=0402, Case Code (Metric)=1005, Current Rating=1.5A, DC Resistance (DCR)=70mR, Max Operating Temperature=125°C, Min Operating Temperature=-55°C, Package Quantity=1, Test Frequency=100MHz, Tolerance=25%, Case/Package=0402, DC Resistance-Max=70mR, Depth=0.5mm, Height=0.5mm, Impedance=80R, Lead Free="Lead Free", Length=1mm, Material=Ferrite, Max Current Rating=1.5A, Max DC Current=1.5A, Number of Circuits=1, Number of Lines=1, Number of Pins=2, Packaging="Tape and Reel", REACH SVHC="No SVHC", RoHS Compliant=Yes, Series=BLM15PD, Termination=SMD/SMT, Width=0.5mm
FL1: "Ceramic Filters Band Pass 1.5dB 50Ohm SMD 4Pin T/R", Package=None, Supplier Part Number 1=712-2450BP15E0100001ECT-ND, Availability=Unavailable, MF="{'manufacturer': u'Johanson Technology'}", MP=2450BP15E0100E, Price=None, Supplier 1=Digikey, Supplier 2=Farnell, Supplier Part Number 2=2148528
IC1: "Integrated Circuit", Manufacturer_Name="Analog Devices", Datasheet Link=https://www.analog.com/MAX17262/datasheet, Height=0.69mm, Manufacturer_Part_Number=MAX17262HEWL+
J1: "0.50mm Socket Strip Assembly", Package=None, Availability=Unavailable, MF="Samtec Inc.", MP=SS5-10-3.00-X-D-K-XX, Price=None
J2: library part DF52-2S-0.8H_21_, "Connector", Manufacturer_Name=Hirose, Mouser Part Number=798-DF52-2S-0.8H21, Datasheet Link=https://datasheet.datasheetarchive.com/originals/distributors/DKDS-30/591726.pdf, Height=1mm, Manufacturer_Part_Number=DF52-2S-0.8H(21), Mouser Price/Stock=https://www.mouser.co.uk/ProductDetail/Hirose-Connector/DF52-2S-0.8H21?qs=%2FKR40Cd6GUpAHUMGMtWbig%3D%3D
J3: "Conn Card Edge 67 POS 0.5mm Solder RA SMD Embossed T/R", Package=None, Availability=Unavailable, MF="{'manufacturer': u'TE Connectivity'}", MP=2199230-5, Price=None
L1: library part CMP-06042-015013-1, "Multilayer type Inductor for Automotive 6.2nH ±0.1nH 0.13Ω 700mA 0402"
L2: library part CMP-06042-011399-1, "Multilayer type Inductor for Automotive 3.4nH ±0.1nH 0.09Ω 900mA 0402"
L3: library part CMP-06042-003843-1, "Multilayer type RF Inductor 3.3nH ±0.3nH 0.12Ω 800mA 0402", Case Code (Imperial)=0402, Case Code (Metric)=1005, Current=300mA, DC Resistance (DCR)=190mR, Inductance=3.3nH, Max Operating Temperature=125°C, Min Operating Temperature=-55°C, Package Quantity=10000, Self Resonant Frequency=6GHz, Test Frequency=100MHz, Case/Package=0402, Core Material=Air, Current Rating=300mA, DC Current=300mA, Depth=0.55mm, Height=0.5mm, Height - Seated (Max)=0.022inch, Lead Free="Lead Free", Length=0.039inch, Max DC Current=300mA, Military Standard=Not, Mount="Surface Mount", Packaging="Tape and Reel", Q Factor=8, Radiation Hardening=No, REACH SVHC="No SVHC", Shielding=Unshielded, Termination=SMD/SMT, Width=0.02inch
L4: library part CMP-06042-016601-1, "FIXED IND 1.0UH 2.0A 95MOHM", RoHS Compliant=Yes
L5 L6: library part CMP-06042-009962-1, "Shielded Wirewound Inductor 2.2uH 20% 1800mA 0.116Ω 0806 (2016)"
MP1: library part CMP-03913-59774856-1, "9774025151R Spacer Material: Steel Mounting: SMT Series: WA-SMSI Thread D: M2.5", Max Operating Temperature=150°C, Min Operating Temperature=-55°C, Height=2.6mm, Length=2.5mm, Material=Steel, NexarPartId=59774856, Outside Diameter=5.1054mm, Packaging="Tape and Reel", Plating=Tin, REACH SVHC=Unknown, RoHS=Compliant, Threaded/Unthreaded=Threaded
P1 P2: library part CMP-2000-06372-1, "Male Header, Pitch 1.27 mm, 1 x 3 Position, Height 4 mm, Tail Length 2.3 mm, -40 to 105 degC, RoHS, Bulk", Manufacturer=Sullins, Package Description="Male Header, Pitch 1.27 mm, 1 x 3 Position, Height 4 mm, Tail Length 2.3 mm", Package Reference=GRPB031VWVN-RC, Standard Package=1, Catalog Drawings=S9014ESeriesTop, Category=Connectors,Interconnects, Connector Type=Header,Unshrouded, Contact Finish=Gold, Contact Finish Thickness=Flash, Contact Mating Length="0.118\"(3.00mm)", Contact Type=MalePin, Datasheet URL=http://www.sullinscorp.com/drawings/71_GRPB___1VWVN-RC,_10957-C.pdf, Datasheet Version="Rev. C, 12/2008", Dynamic Catalog=GRPB, Family=RectangularConnectors-Headers,MalePins, Manufacturer URL=http://www.sullinscorp.com/, Mating Products="S9010E-03-ND / -CONNHEADER.050\"3POSR/APCB / S9008E-03-ND / -CONNHEADER.050\"3POSPCBGOLD / S9005E-03-ND / -CONNHEADER.050\"3POSSMDGOLD", Mounting Technology=ThroughHole, Mounting Type=ThroughHole, Number of Positions=3, Number of Positions Loaded=All, Number of Rows=1, Other Names=S9014E-03, Packaging=Bulk, Pitch="0.050\"(1.27mm)", Termination=Solder
R1 R2 R4 R9 R12 R14 R19 R21 R27 R28 R29 R30: library part CMP-009-00004-5, "Chip Resistor, 0 Ohm, 0.063 W, -55 to 155 degC, 0402 (1005 Metric)", Case/Package=0402, Max Operating Temperature=155°C, Min Operating Temperature=-55°C, Power=63mW, Voltage Rating=50V, Mounting Technology=SM, Pins=2, RoHS Compliant=True
R3: library part CMP-2002-07344-1, Manufacturer="Yageo / Phycomp", Part Number=RC0402FR-07100RL
R5 R6 R15 R16 R20 R22 R23 R24 R25 R26: library part CMP-2002-07343-1, Manufacturer="Yageo / Phycomp", Part Number=RC0402FR-07100KL
R7 R8: library part CMP-2002-07865-1, Manufacturer=Yageo, Part Number=RC0402FR-131KL
R10 R11 R17 R18: library part CMP-1011-00446-2, Manufacturer=Yageo, Part Number=RC0402FR-07280RL
R13: library part CMP-2002-07544-1, Manufacturer=Yageo, Part Number=RC0402FR-07267KL
R31 R32 R33 R34 R35: library part CMP-2002-07520-1, Manufacturer="Yageo / Phycomp", Part Number=RC0402FR-0722RL
SW1 SW2: library part CMP-2100-03586-2, "SWITCH TACTILE SPST-NO 0.05A 12V", Contact Current Rating=50mA, Contact Resistance=100mR, Insulation Resistance=100MR, Max Operating Temperature=70°C, Max Voltage Rating (DC)=12V, Min Operating Temperature=-25°C, Operating Force=1.5N, Package Quantity=1, Ratings="Dust Proof", Actuator Length=0.4mm, Actuator Type=Standard, Contact Material=Silver, Current Rating=50mA, Depth=2.5mm, Electrical Life=200000Cycles, Height=1.2mm, Illumination Type=Non-Illuminated, Lead Free="Lead Free", Length=4mm, Max Current Rating=50mA, Mechanical Life=200000Cycles, Mount="Surface Mount", Orientation=Straight, Packaging="Tape and Reel", Switch Function=Off-Mom, Switch Travel=0.15mm, Termination=SMD/SMT, Throw Configuration=SPST, Voltage Rating (DC)=12V, Weight=0.000776oz, Width=3mm
U1: library part CMP-85923-000011-1, "IC RF SWITCH SP3T 6GHZ 8MLP", Case/Package=QFN, Frequency=6GHz, Max Operating Temperature=100°C, Min Operating Temperature=-40°C, Operating Frequency="20 MHz to 6 GHz", Package Quantity=3000, Test Frequency=5.9GHz, IIP3=50dBm, Impedance=50R, Insertion Loss=0.8dB, Max Frequency=6GHz, Mount="Surface Mount", Number of Pins=8, Number of Switches=1, P1dB=26dBm, Packaging="Tape and Reel", Radiation Hardening=No, RoHS Compliant=Yes, Series=-, Technology=GAAS, Throw Configuration=SP3T, Turn-Off Delay Time=20ns, Turn-On Delay Time=55ns
U2: library part SIWG917
U3: "Buffer, Non-Inverting 1 Element 1 Bit per Element Push-Pull Output SC-70-5", Package=None, Availability=Unavailable, MF="{'manufacturer': u'ON Semiconductor'}", MP=NC7SV17P5X, Price=None
U4 U5: library part CMP-04918-000401-1, "ULTRA LOW IQ BUCK CONVERTER"
U6: library part CMP-04910-000105-1, "IC PWR SWITCH P-CHAN 1:1 4DSBGA", Max Operating Temperature=85°C, Max Output Current=2A, Min Operating Temperature=-40°C, Fault Protection="Reverse Current", Number of Channels=1, Number Of Outputs=1, Output Configuration="High Side", Packaging="Cut Tape", RoHS Compliant=Yes
Y1: library part CM8V-T1A-32.768KHZ-7PF-20PPM-TA-QC, Package=None, Availability=Unavailable, MF="{'manufacturer': u'Micro Crystal'}", MP=CM8V-T1A-32.768KHZ-7PF-20PPM-TA-QC, Price=None, Supplier 1="Arrow Electronics", Supplier Part Number 1=CM8V-T1A-32.768KHZ-7PF-20PPM-TA-QC
Y2: Package=None, Supplier Part Number 1=6169727, Availability=Unavailable, MF="{'manufacturer': u'EPSON'}", MP="FA-20H 40.0000MF10Z-K3", Price=None, Supplier 1="Future Electronics"

## Free pads (board coordinates)
  round 5 / inner round 3 / far side round 5 hole 2.4: 1(3.24,3.01) 1(3.24,25.01) 1(51.24,3.01) 1(51.24,25.01)

## Via types
v1: diameter 0.3, hole 0.15, Top Layer to Bottom Layer, tented both sides, 299 vias
v2: diameter 0.6, hole 0.3, Top Layer to Bottom Layer, tented both sides, 37 vias
v3: diameter 0.3/0.3/0.3/0.3/0.3/0.3 (per signal layer), hole 0.15, Top Layer to Bottom Layer, tented both sides, 1 vias

## Nets (pads, with @x,y where several pads share a name; then routed paths per layer and width w, separated by ;. In a path a pad name is that pad's centre, name@x,y a point inside that pad or via, vN(x,y) a via of type N, cw(c..) or ccw(c..) an arc to the next point about the centre after c; other vN are vias at no path point)
1V8: C50.1 FB2.2 R12.2 U6.A2
1V8_SW: J3.1 J3.3 J3.7 J3.9 P1.3 P2.3 R14.2 R22.2 R24.2 R26.2 U6.A1 | length 0.6
  Bottom Layer w0.1: v1(49.4,14) 49.425,13.975 R14.2@50,13.975
  other v1: 49.525,22.1 50.175,22.225 49.25,22.8
3V3: C36.1 C37.1 D1.1 D1.3 FB1.2 R21.1 U2.B8 | length 6.6
  Top Layer w0.1: v1(22.264,21.641) 22.264,21.695 22.609,22.04 23.065,22.04 D1.3@23.125,22.1 D1.1@23.125,21.1 ; U2.B8@28.975,14.5 31.975,14.5 32.55,13.925 32.55,13.4 C37.1@32.7,13.25
  other v1: 34.9,12.6 35.5,12.6 34.9,13.12 35.5,13.12 22.186,21.137 21.674,21.689
AUX_AVDD: C24.1 U2.B34 | length 2.4
  Top Layer w0.1: U2.B34@25.45,10.475 25.45,9.3 25.8,8.95 25.8,8.325 C24.1@25.75,8.275
BOOT0: J3.32 R15.1 R22.1 R23.1 | length 12.8
  Top Layer w0.1: J3.32@39.425,15.5 40.358,15.5 40.458,15.4 v1(42.1,15.4)
  Bottom Layer w0.1: R23.1@41.175,7.225 R22.1@41.975,7.225 R15.1@42.775,7.225 42.775,10.269 42.1,10.944 v1(42.1,15.4)
BOOT1: J3.34 R16.1 R24.1 R25.1 | length 13
  Top Layer w0.1: J3.34@39.425,15 v1(42.6,15)
  Bottom Layer w0.1: v1(42.6,15) 42.6,14.946 42.499,14.844 42.499,11.101 43.575,10.025 R16.1@43.575,7.225 R25.1@45.15,7.225
EN_1V8: R30.1 U2.B3 | length 27.6
  Top Layer w0.1: U2.B3@28.975,12 30.174,12 31.124,11.05 31.695,11.05 v1(31.725,11.02) ; v1(41.4,10.2) 43.4,10.2 v1(45.6,12.4)
  Int2 (Sign) w0.1: v1(45.6,12.4) 47.919,12.4 48.119,12.2 50.385,12.2 v1(53.177,9.408)
  Bottom Layer w0.1: v1(31.725,11.02) 31.755,11.02 32.375,10.4 41.176,10.4 41.323,10.253 41.399,10.253 41.4,10.254 v1(41.4,10.2) ; R30.1@53.175,9.9 53.177,9.898 v1(53.177,9.408)
EN_1V8_GAP: R20.2 U2.A5 U6.B2 | length 28.5
  Top Layer w0.1: U2.A5@29.475,12.75 29.484,12.759 29.991,12.759 30.066,12.835 v1(30.099,12.835) ; v1(48.897,21.328) 49.303,21.328 R20.2@49.325,21.35 ; R20.2@49.325,21.25 49.4,21.175 U6.B2@50.35,21.175
  Bottom Layer w0.1: v1(30.099,12.835) 30.088,12.845 30.088,13.568 30.945,14.425 31.7,14.425 34.05,12.075 35.9,12.075 39.575,15.75 39.575,18.625 42.178,21.228 v1@48.897,21.228
FPGA_CTRL_AFETXMUX: J1.18 U2.B22 | length 19.7
  Top Layer w0.1: v1(17.519,15.947) 17.972,16.4 21.38,16.4 21.8,15.98 21.8,15.863 22.663,15 U2.B22@23.425,15
  Bottom Layer w0.1: J1.18@6.075,15.76 6.165,15.85 10.06,15.85 11.41,17.2 14.9,17.2 16.6,15.5 17.1,15.5 17.519,15.919 v1(17.519,15.947)
FPGA_CTRL_EXTINTMUX: J1.14 U2.A25 | length 19.6
  Top Layer w0.1: v1(18.06,15.828) 18.432,16.2 21.297,16.2 21.6,15.897 21.6,15.733 22.583,14.75 U2.A25@22.925,14.75
  Bottom Layer w0.1: J1.14@6.075,14.76 9.36,14.76 11.6,17 14.8,17 16.5,15.3 17.488,15.3 18.016,15.828 v1(18.06,15.828)
FPGA_CTRL_INT: J1.10 U2.B24 | length 20.5
  Top Layer w0.1: v1(18.609,15.754) 18.609,15.52 19.204,14.925 21.526,14.925 22.451,14 U2.B24@23.425,14
  Bottom Layer w0.1: J1.10@6.075,13.76 6.135,13.7 7.2,13.7 7.6,14.1 9.1,14.1 11.8,16.8 14.7,16.8 16.4,15.1 17.898,15.1 18.468,15.67 18.471,15.67 18.555,15.754 v1(18.609,15.754)
FPGA_CTRL_RESET: J1.20 U2.A23 | length 18.6
  Top Layer w0.1: v1(21.589,16.986) 22.825,15.75 U2.A23@22.925,15.75
  Bottom Layer w0.1: J1.20@6.075,16.26 6.135,16.2 9.996,16.2 11.196,17.4 15,17.4 16.1,16.3 16.5,16.3 17.188,16.988 21.587,16.988 v1(21.589,16.986)
FPGA_PWR_LVDS: J1.16 U2.A36 | length 26.8
  Top Layer w0.1: v1(24.29,8.944) 24.344,8.944 24.514,9.115 24.615,9.115 24.7,9.2 U2.A36@24.7,9.975
  Int2 (Sign) w0.1: v1(7.075,15.4) 6.6,15.4 6.075,14.875 6.075,12.76 6.535,12.3 7.9,12.3 12.875,7.325 18.987,7.325 20.259,8.597 22.287,8.597 22.634,8.944 v1(24.29,8.944)
  Bottom Layer w0.1: J1.16@6.075,15.26 6.175,15.36 7.035,15.36 v1(7.075,15.4)
FPGA_PWR_NEG_5V: J1.15 U2.A37 | length 33.7
  Top Layer w0.1: U2.A37@25.2,9.975 25.2,9.024 25.4,8.824 v1(25.4,8.8)
  Int2 (Sign) w0.1: v1(0.773,15.261) 4.634,11.4 7.3,11.4 12.3,6.4 25.5,6.4 26.3,7.2 26.3,8.4 25.9,8.8 v1(25.4,8.8)
  Bottom Layer w0.1: v1(0.773,15.261) J1.15@1.405,15.26 J1.15@1.405,15.26
FPGA_PWR_NEG_HV: J1.17 U2.A38 | length 34.6
  Top Layer w0.1: v1(22.402,7.398) 22.4,7.396 22.4,7 23.025,6.375 25.55,6.375 26.3,7.125 26.3,8.75 25.7,9.35 U2.A38@25.7,9.975
  Int2 (Sign) w0.1: v1(0.594,15.786) 0.596,15.784 0.816,15.784 4.9,11.7 7.5,11.7 12.48,6.72 21.72,6.72 22.398,7.398 v1(22.402,7.398)
  Bottom Layer w0.1: v1(0.594,15.786) 1.379,15.786 J1.17@1.405,15.76
FPGA_PWR_POS_HV: J1.19 U2.A40 | length 32.5
  Top Layer w0.1: U2.A40@26.7,9.975 26.75,9.925 26.75,9.75 v1(27.05,9.45)
  Int2 (Sign) w0.1: v1(0.763,16.313) 5.076,12 7.7,12 12.675,7.025 19.088,7.025 20.363,8.3 22.3,8.3 22.52,8.52 24.583,8.52 25.513,9.45 v1(27.05,9.45)
  Bottom Layer w0.1: v1(0.763,16.313) 1.352,16.313 J1.19@1.405,16.26
GAP_GPIO_0: J3.52 U2.B7 | length 11.9
  Top Layer w0.1: U2.B7@28.975,14 31.473,14 v1(31.702,13.771) ; v1(38.275,10.78) 38.275,10.774 38.449,10.6 39.325,10.6 J3.52@39.425,10.5
  Int2 (Sign) w0.1: v1(31.702,13.771) 32.769,13.771 35.76,10.78 v1(38.275,10.78)
GAP_GPIO_1: J3.54 U2.A7 | length 11.5
  Top Layer w0.1: U2.A7@29.475,13.75 30.96,13.75 31.127,13.582 v1(31.181,13.582) ; v1(38.275,10.02) 38.295,10 J3.54@39.425,10
  Int2 (Sign) w0.1: v1(31.181,13.582) 31.223,13.582 31.414,13.391 32.709,13.391 35.7,10.4 37.95,10.4 38.055,10.295 38.19,10.16 ; 38.19,10.159 38.275,10.074 v1(38.275,10.02)
GAP_GPIO_2: J3.56 U2.B6 | length 12.2
  Top Layer w0.1: U2.B6@28.975,13.5 30.497,13.5 30.627,13.37 v1(30.655,13.37) ; v1(38.275,9.425) 38.329,9.425 38.404,9.5 J3.56@39.425,9.5
  Int2 (Sign) w0.1: v1(30.655,13.37) 30.655,13.345 33.9,10.1 37.6,10.1 v1(38.275,9.425)
GAP_GPIO_3: J3.58 U2.A6 | length 11.9
  Top Layer w0.1: U2.A6@29.475,13.25 30.238,13.25 30.652,12.836 v1(30.652,12.805) ; v1(38.275,8.775) 38.5,9 J3.58@39.425,9
  Int2 (Sign) w0.1: v1(30.652,12.805) 30.657,12.805 33.663,9.8 37.25,9.8 v1(38.275,8.775)